# Altium PCB FlightEstimator.PcbDoc (part 1 of 2)
Units mm, origin at the board's own origin, x right, y up, seen from the top; angles counter-clockwise.
Board outline 49.66 x 49.66 mm, 6 copper layers (Top Layer, GND1, Middle, GND2, GND3, Bottom Layer), stack 1.959 mm thick; 78 components, 52 nets, 392 pads, 336 vias.
Unrouted connection lines stored in the file: 154.
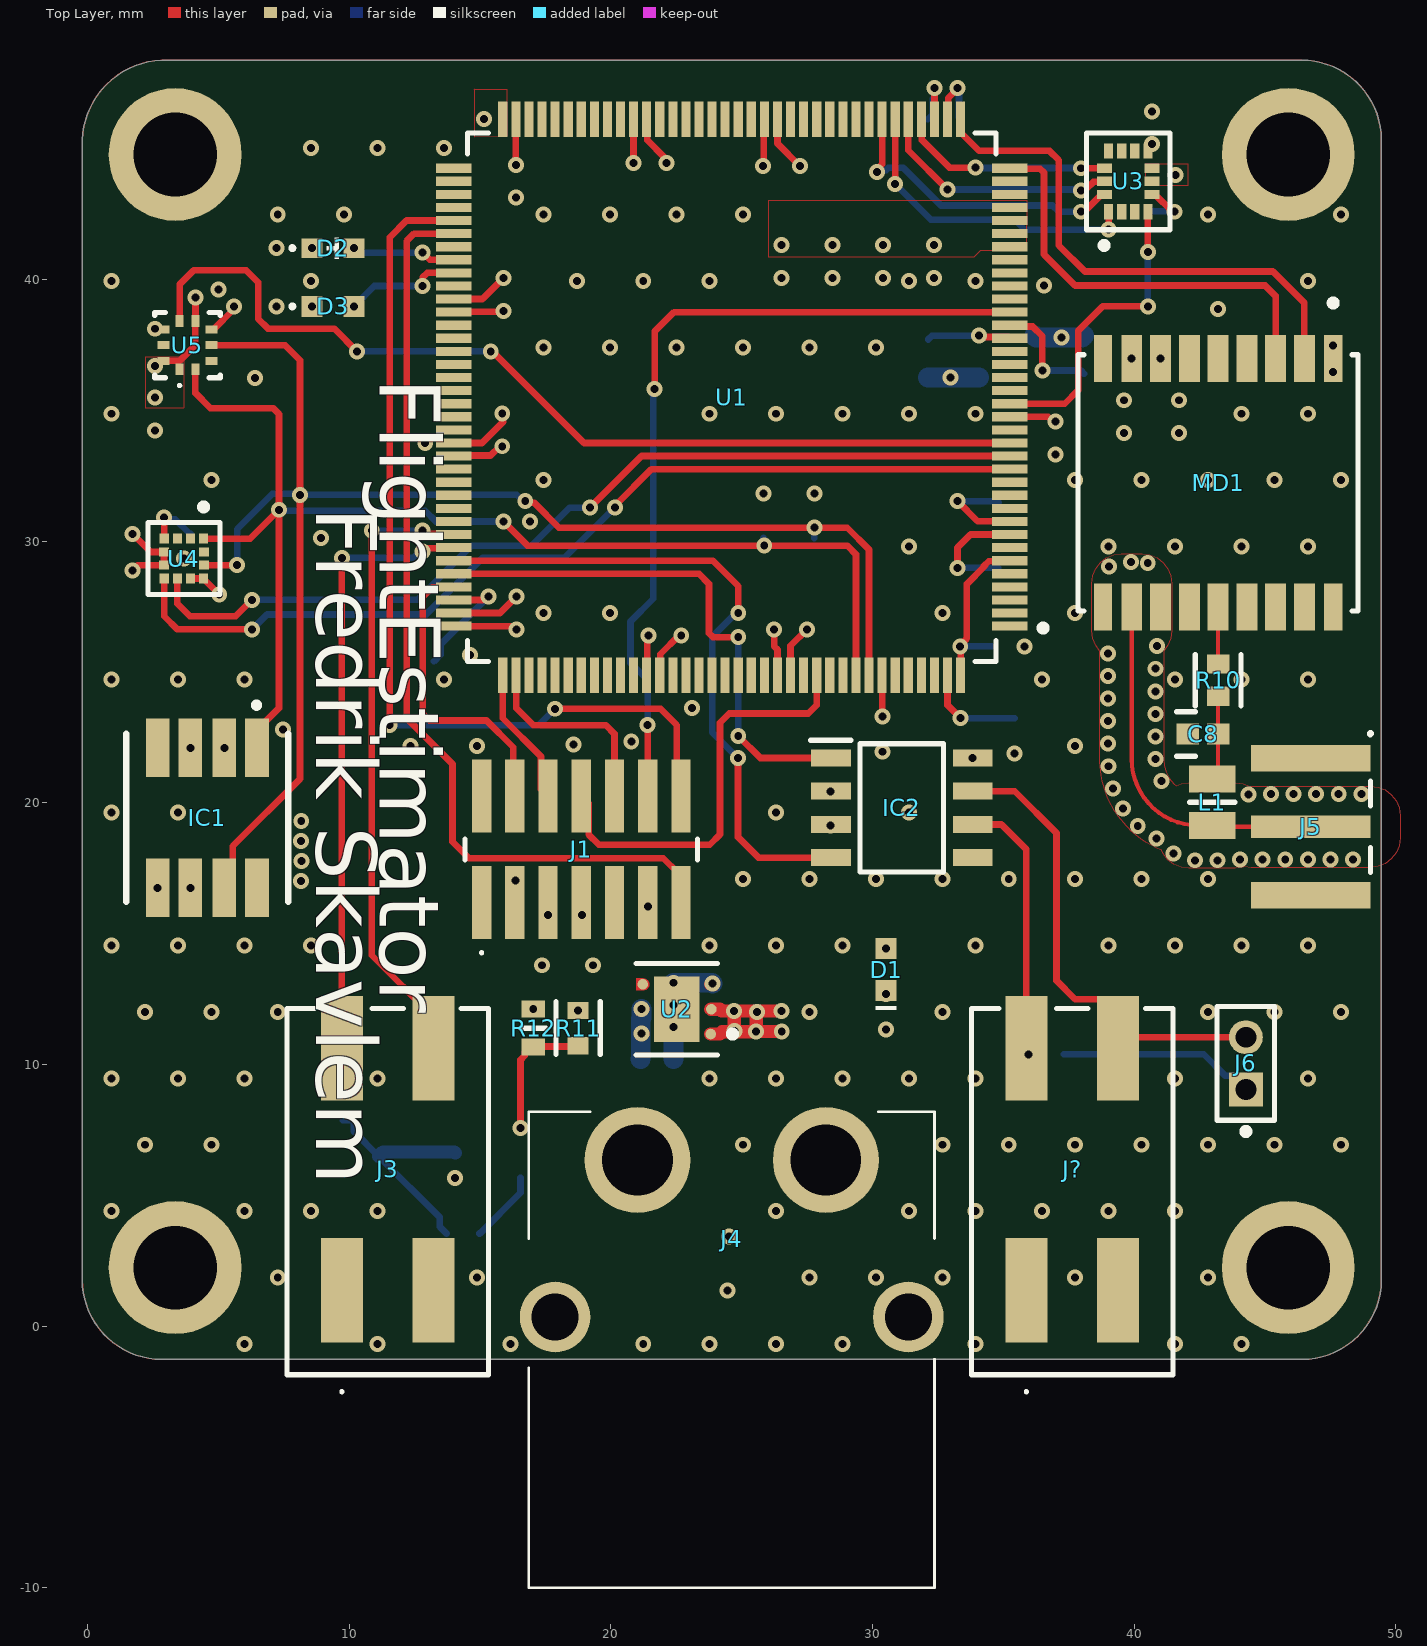
[diagram p0: Top Layer view]
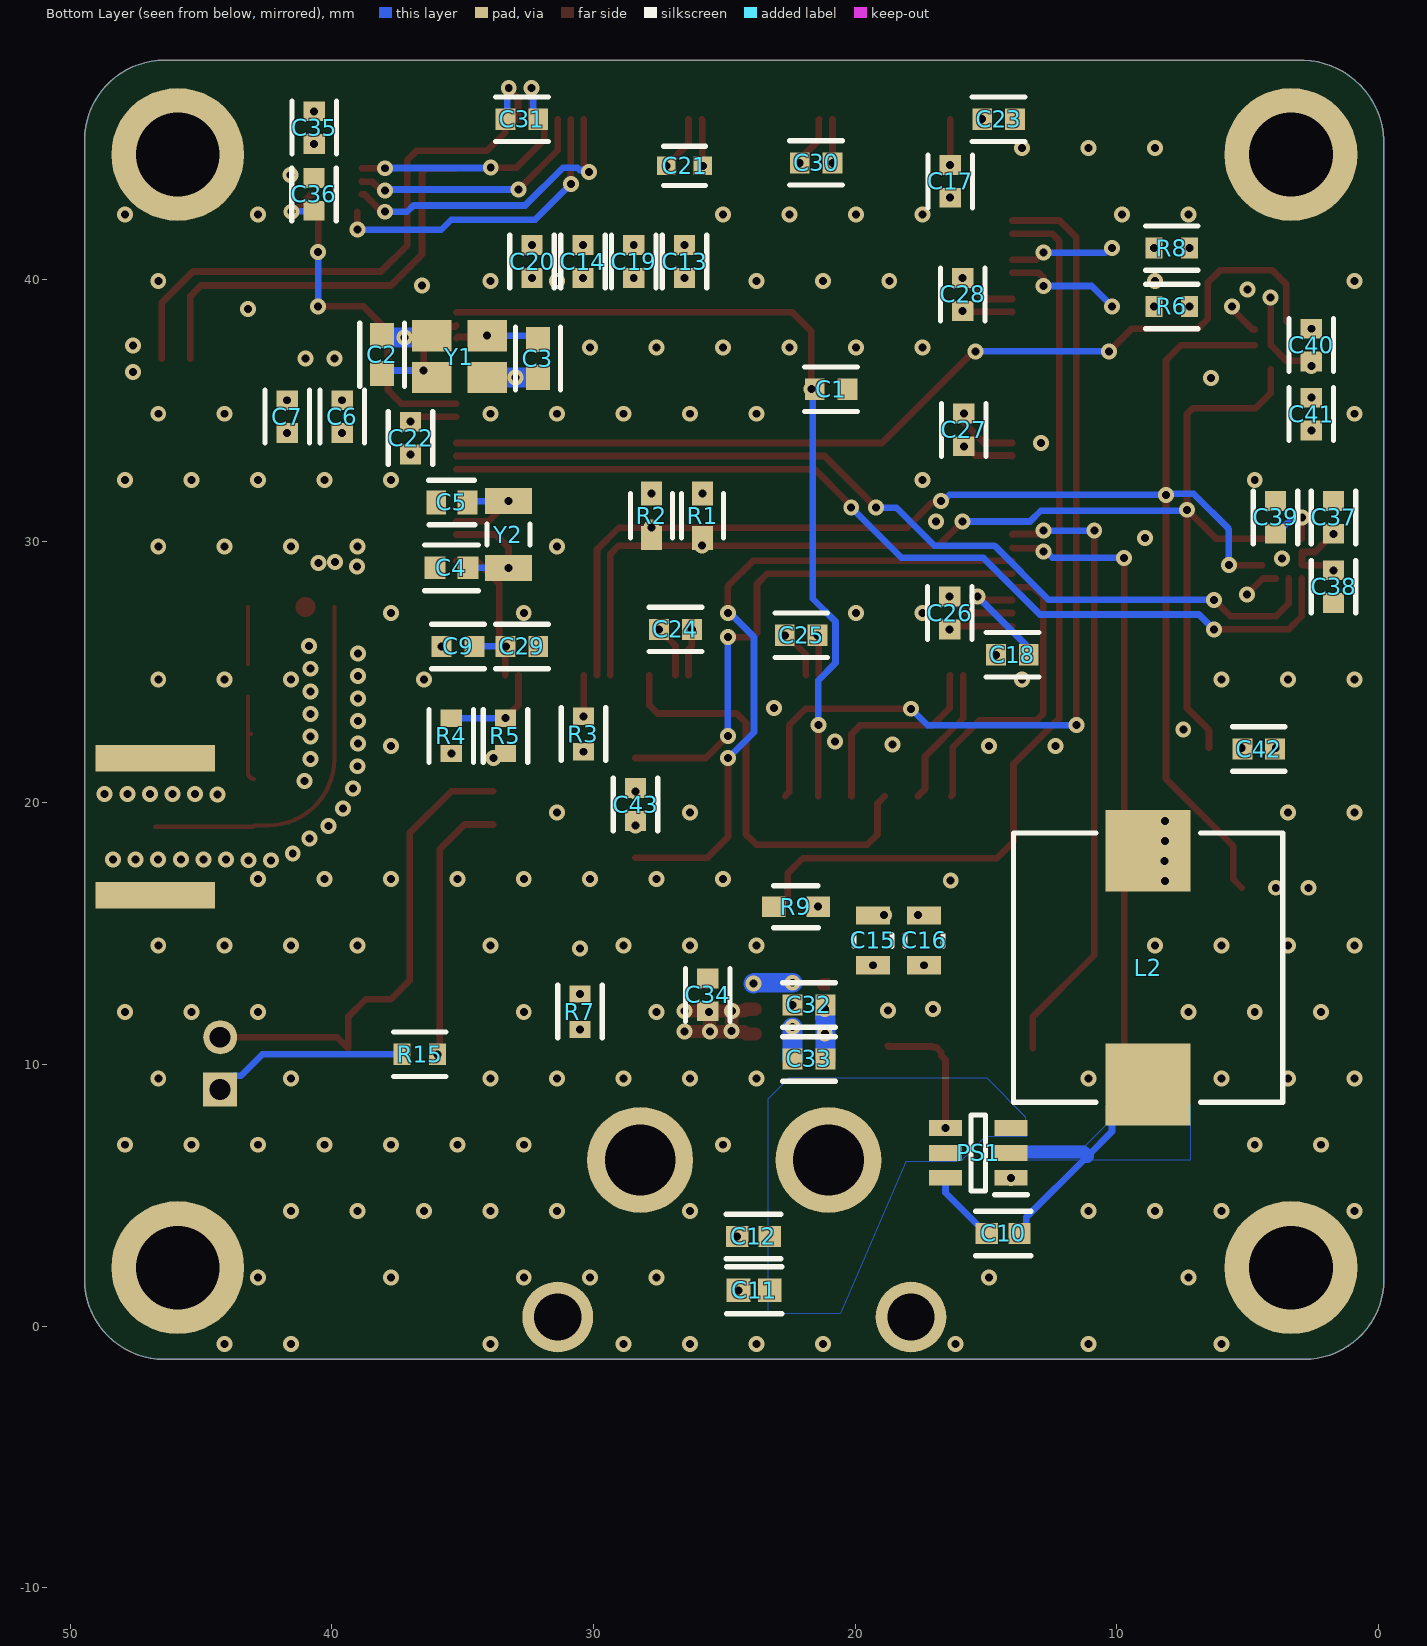
[diagram p1: Bottom Layer view, seen from below]
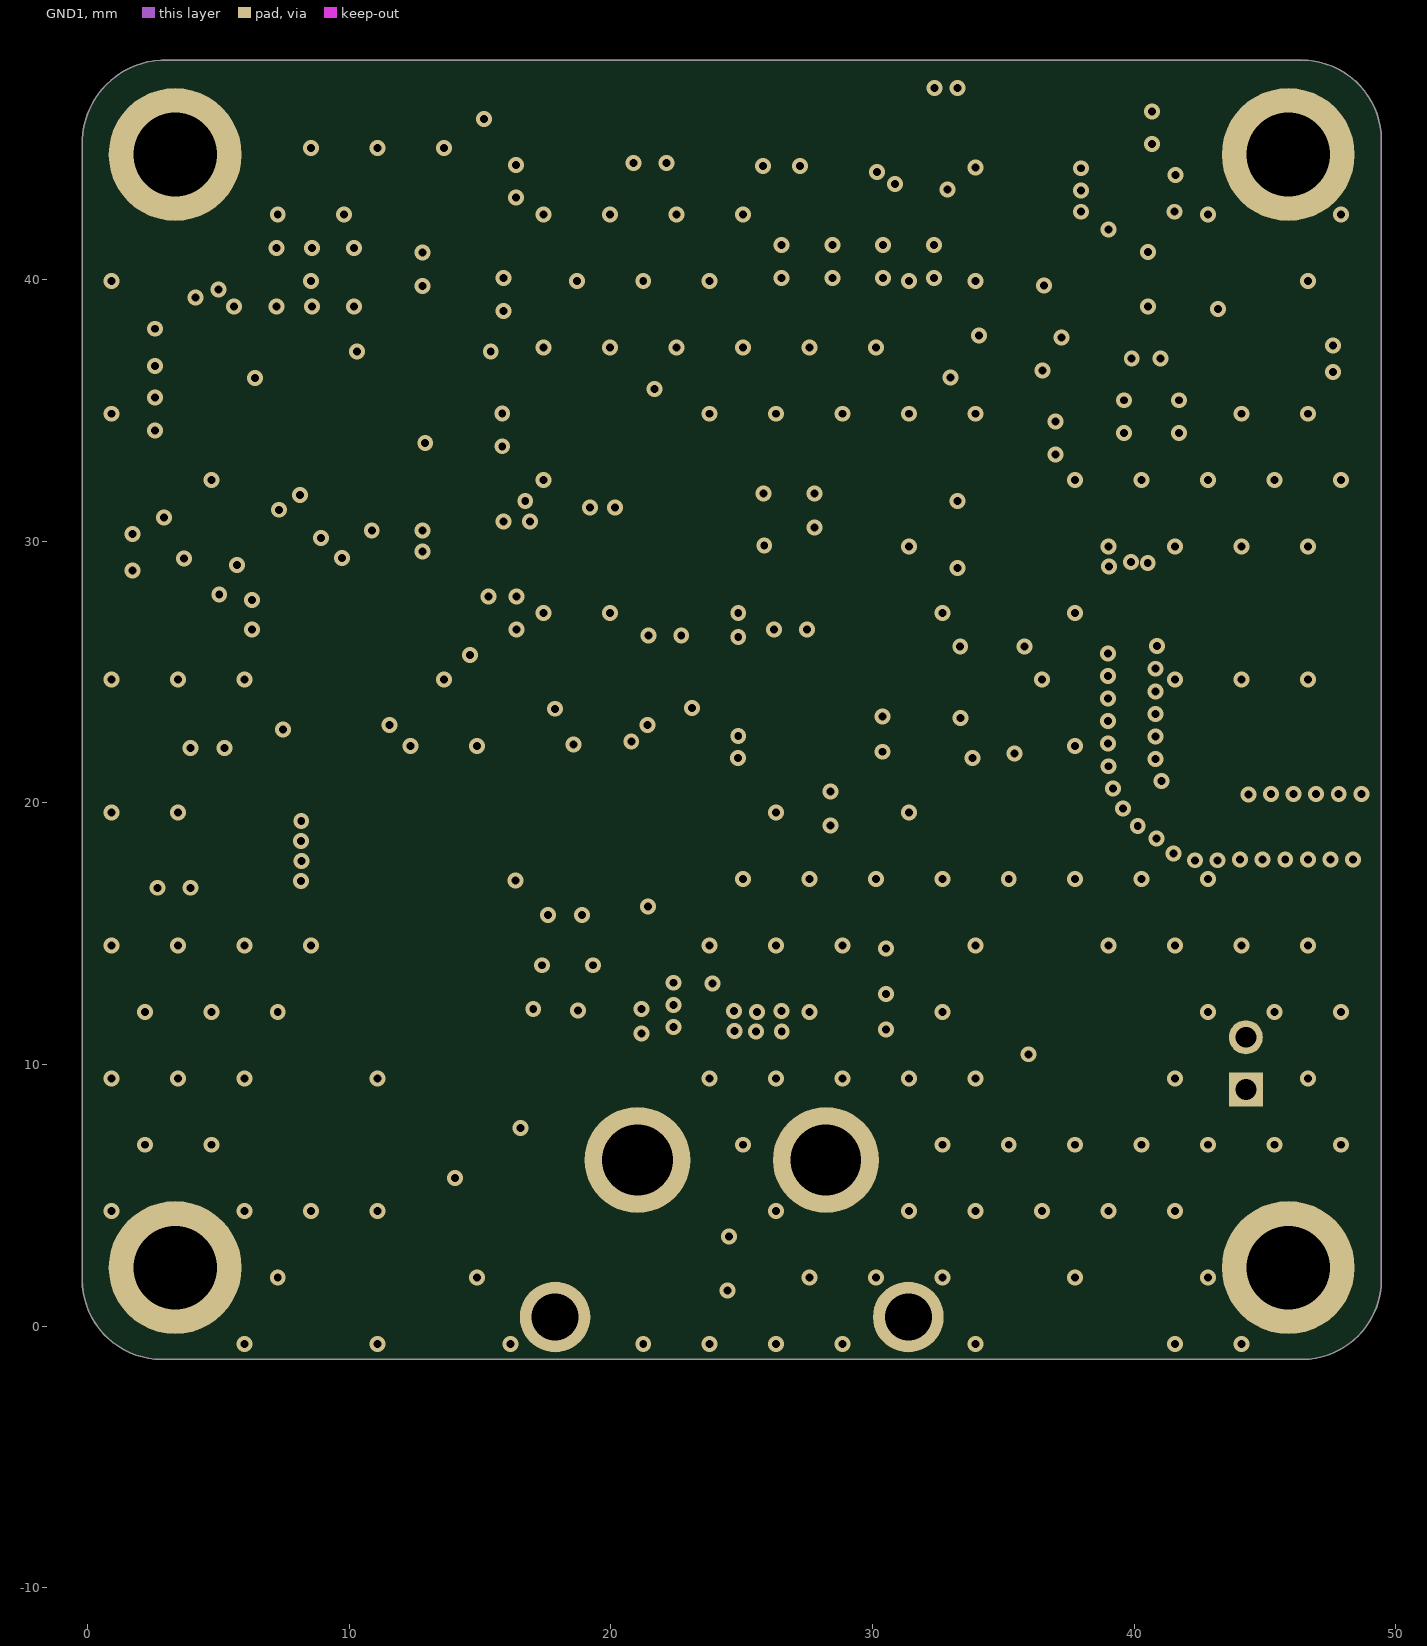
[diagram p2: GND1]
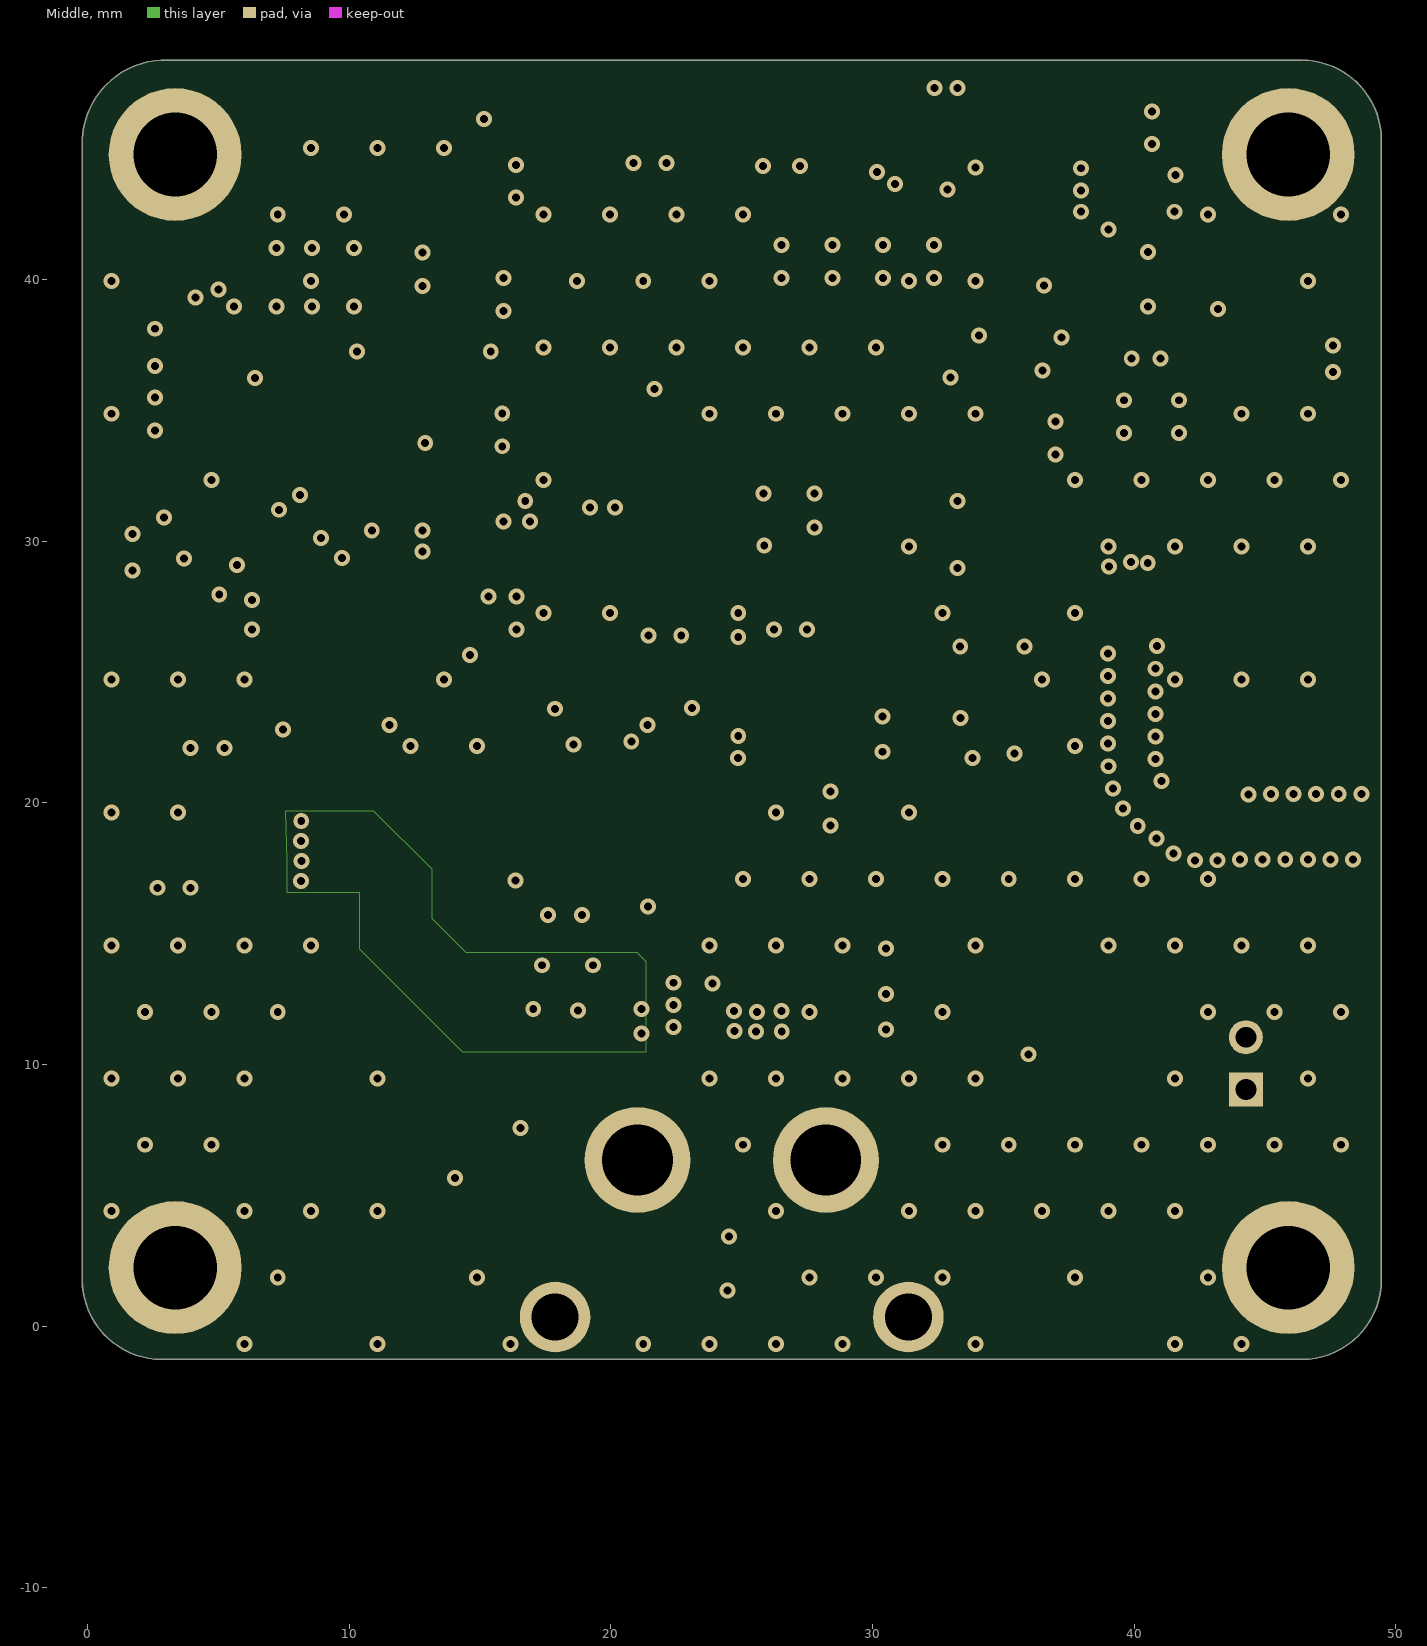
[diagram p3: Middle]
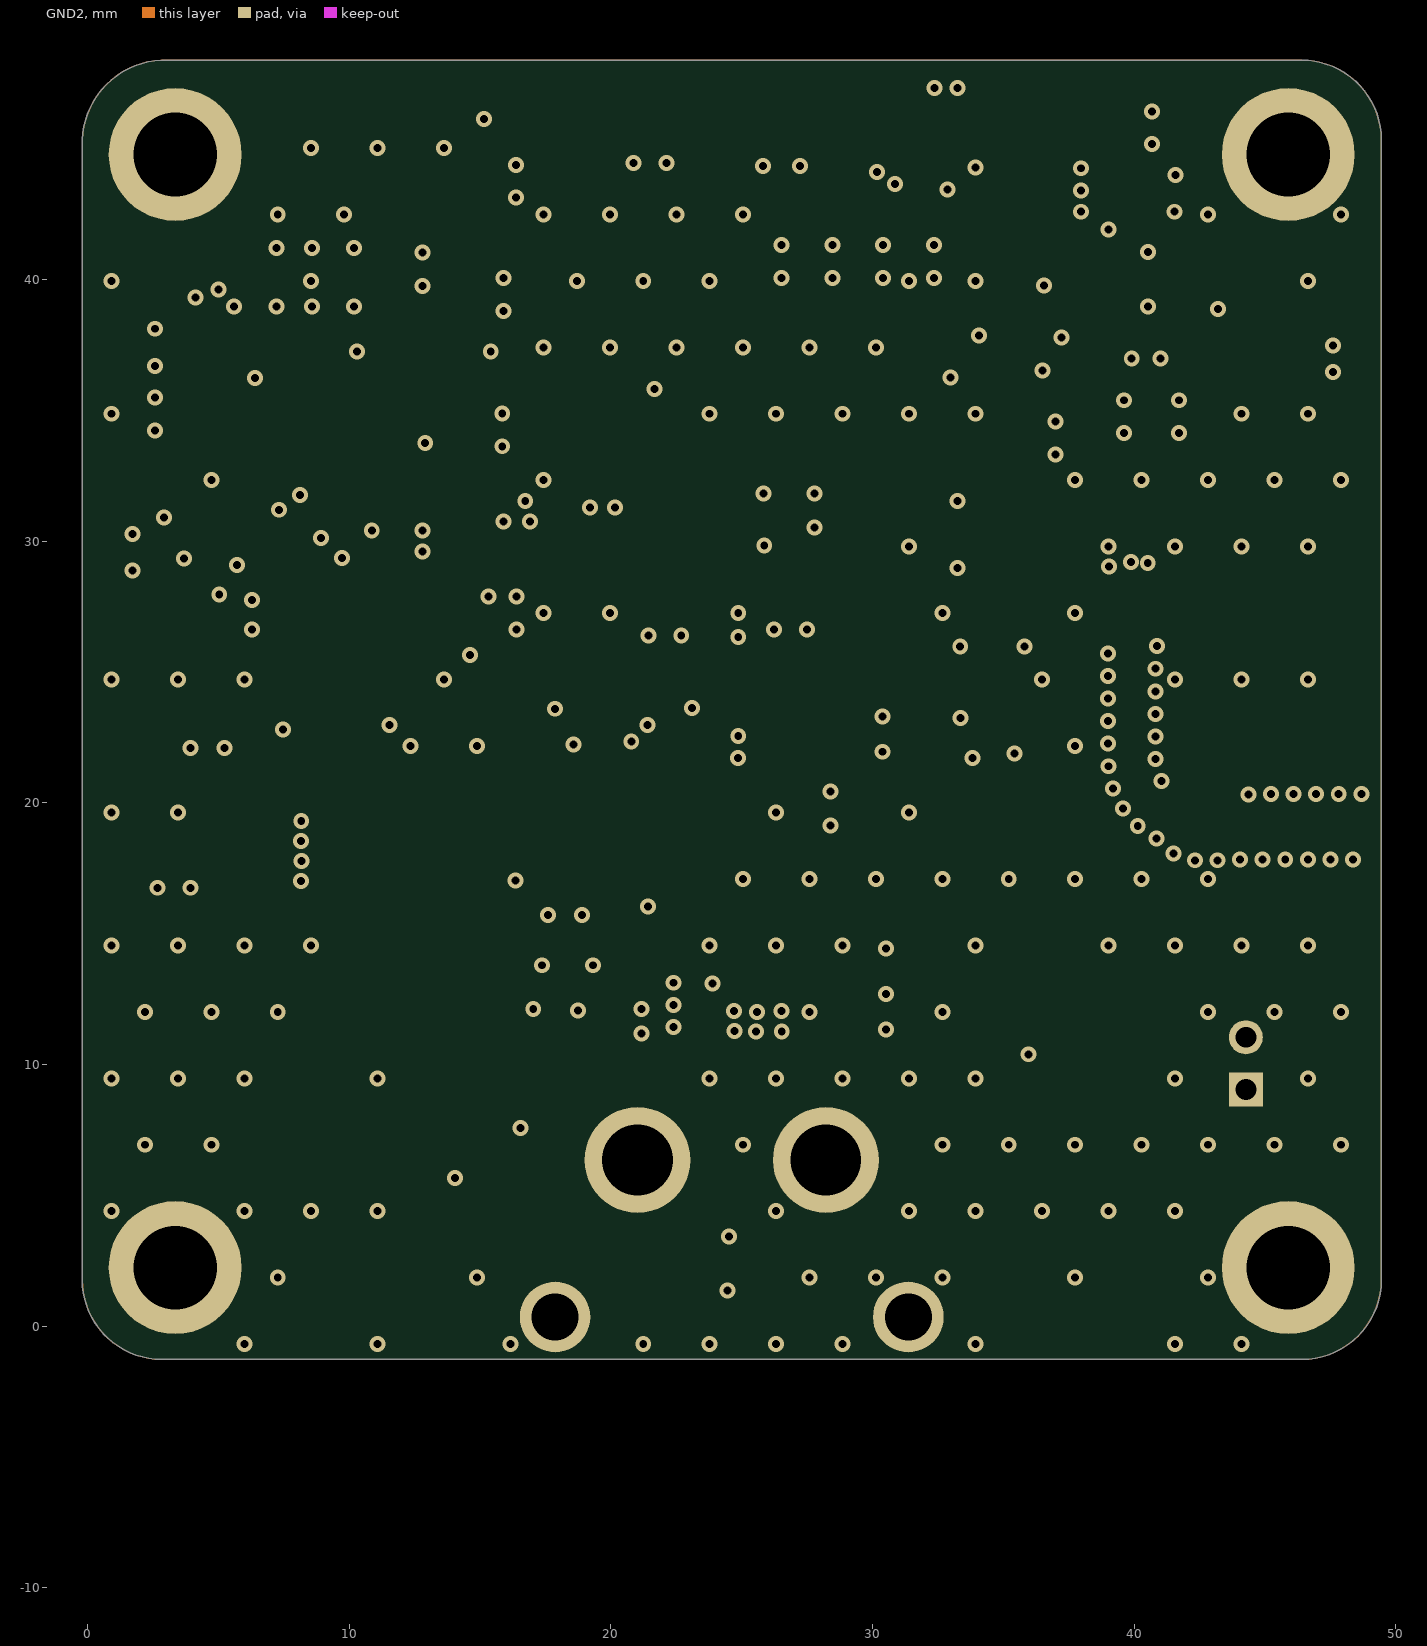
[diagram p4: GND2]
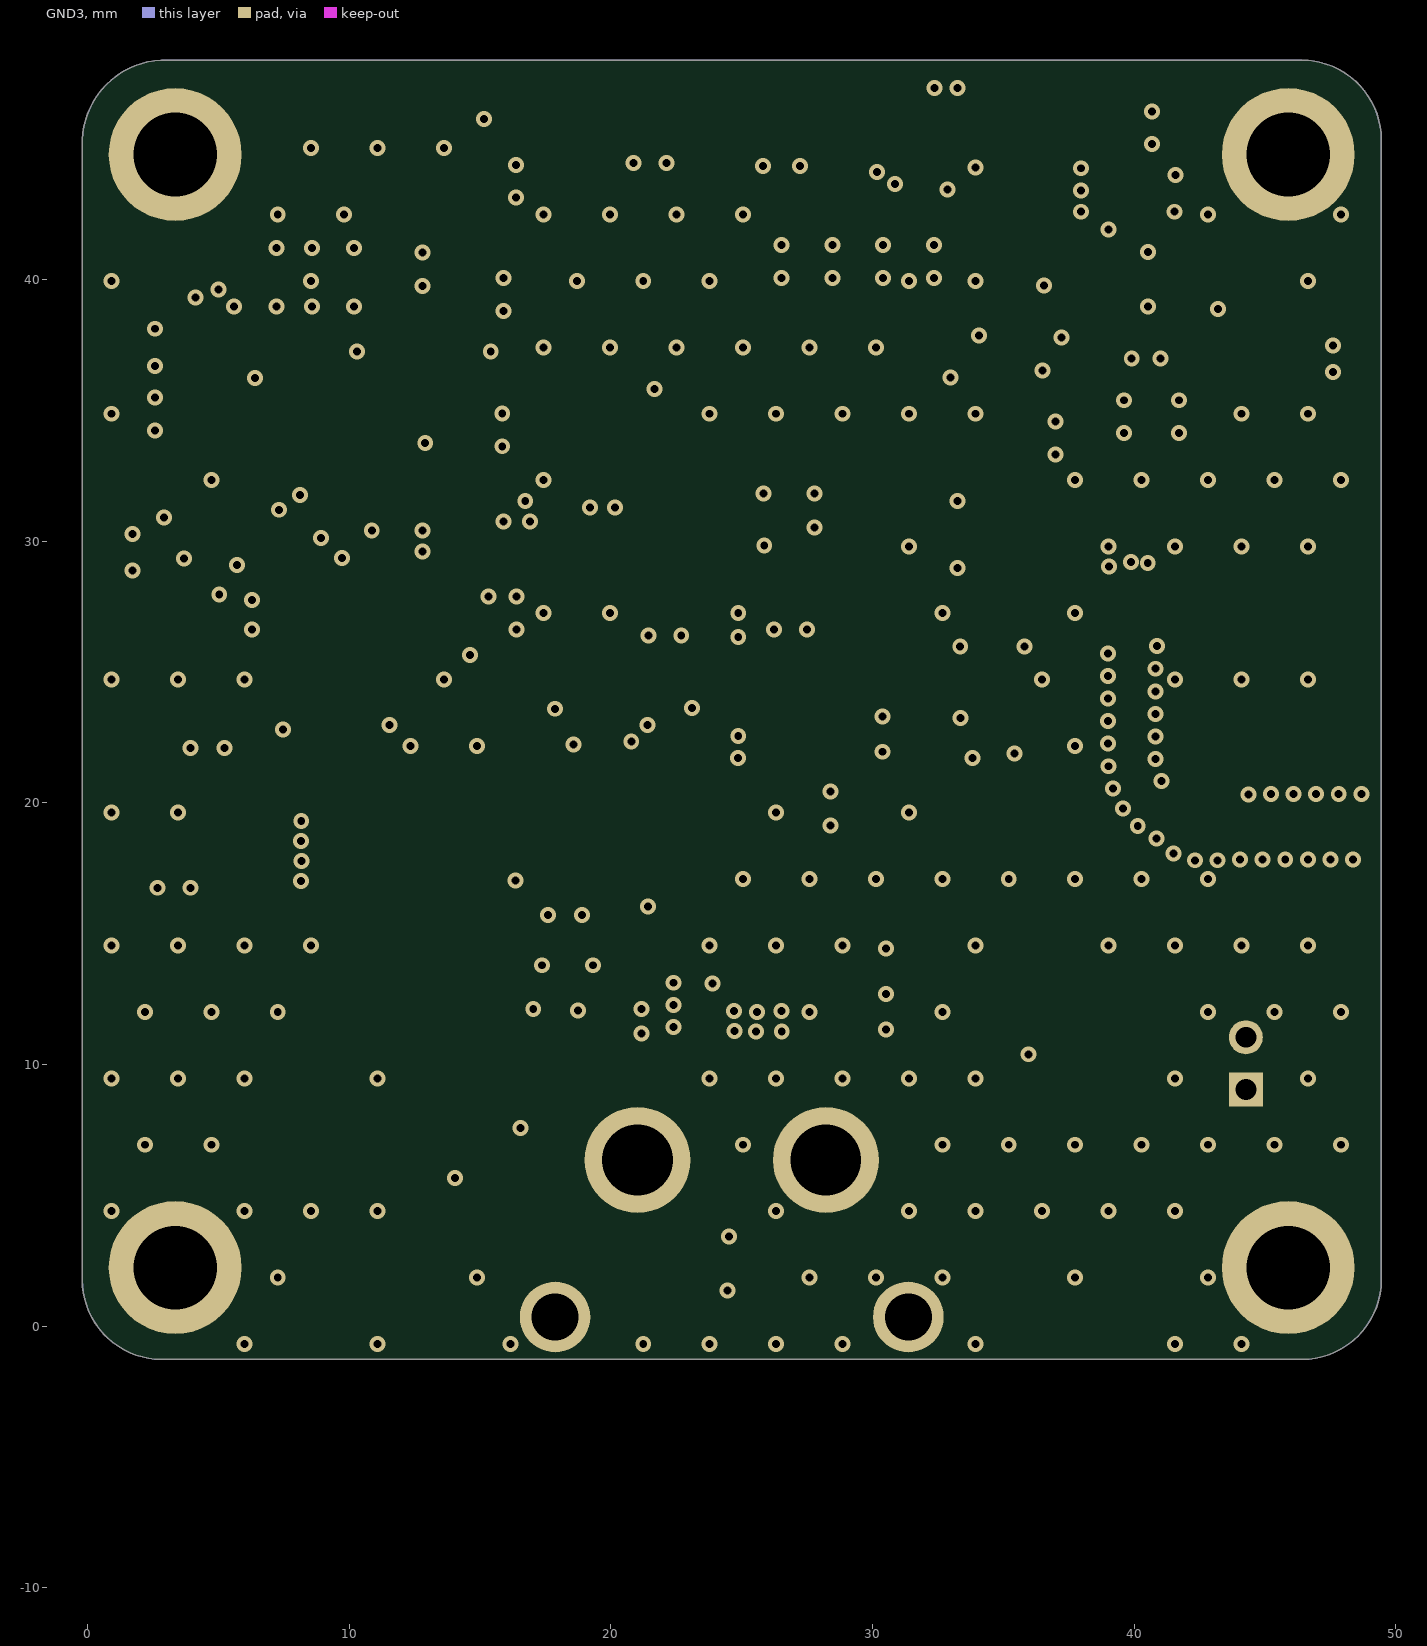
[diagram p5: GND3]
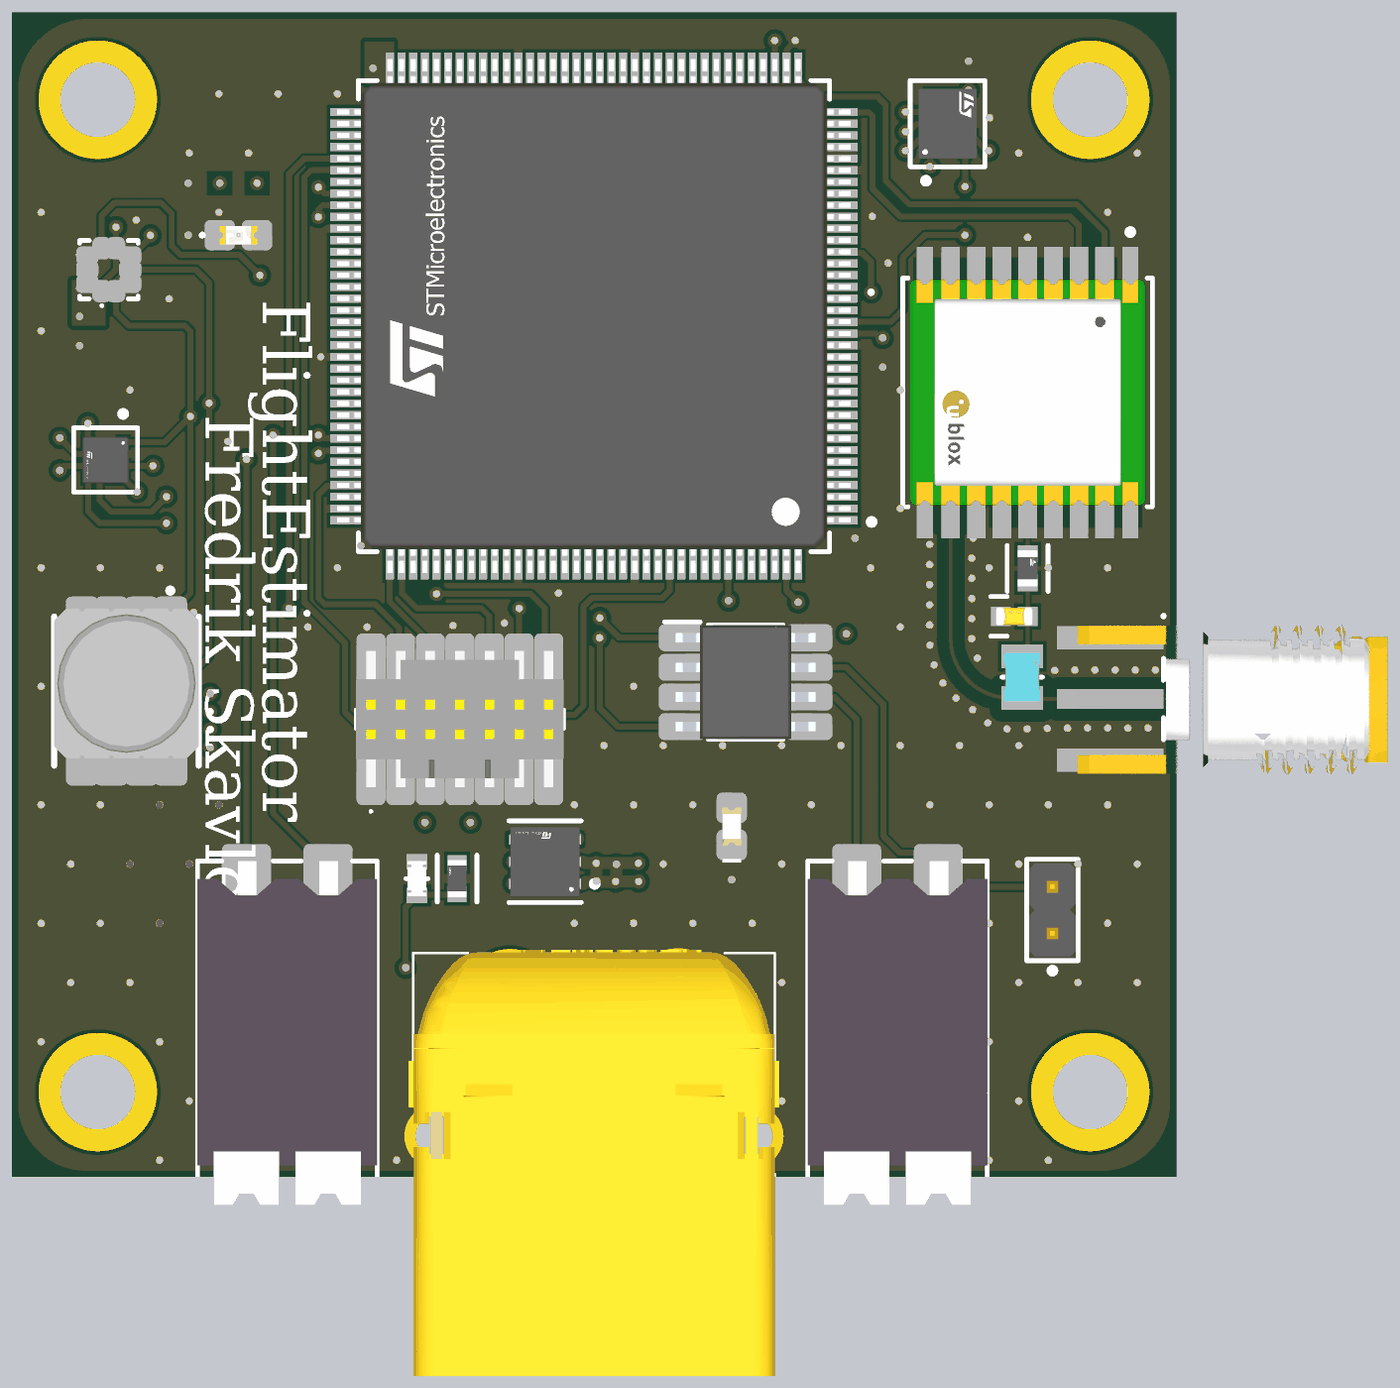
[diagram p7: 3D render of the assembled board from above, using the file's embedded part models]
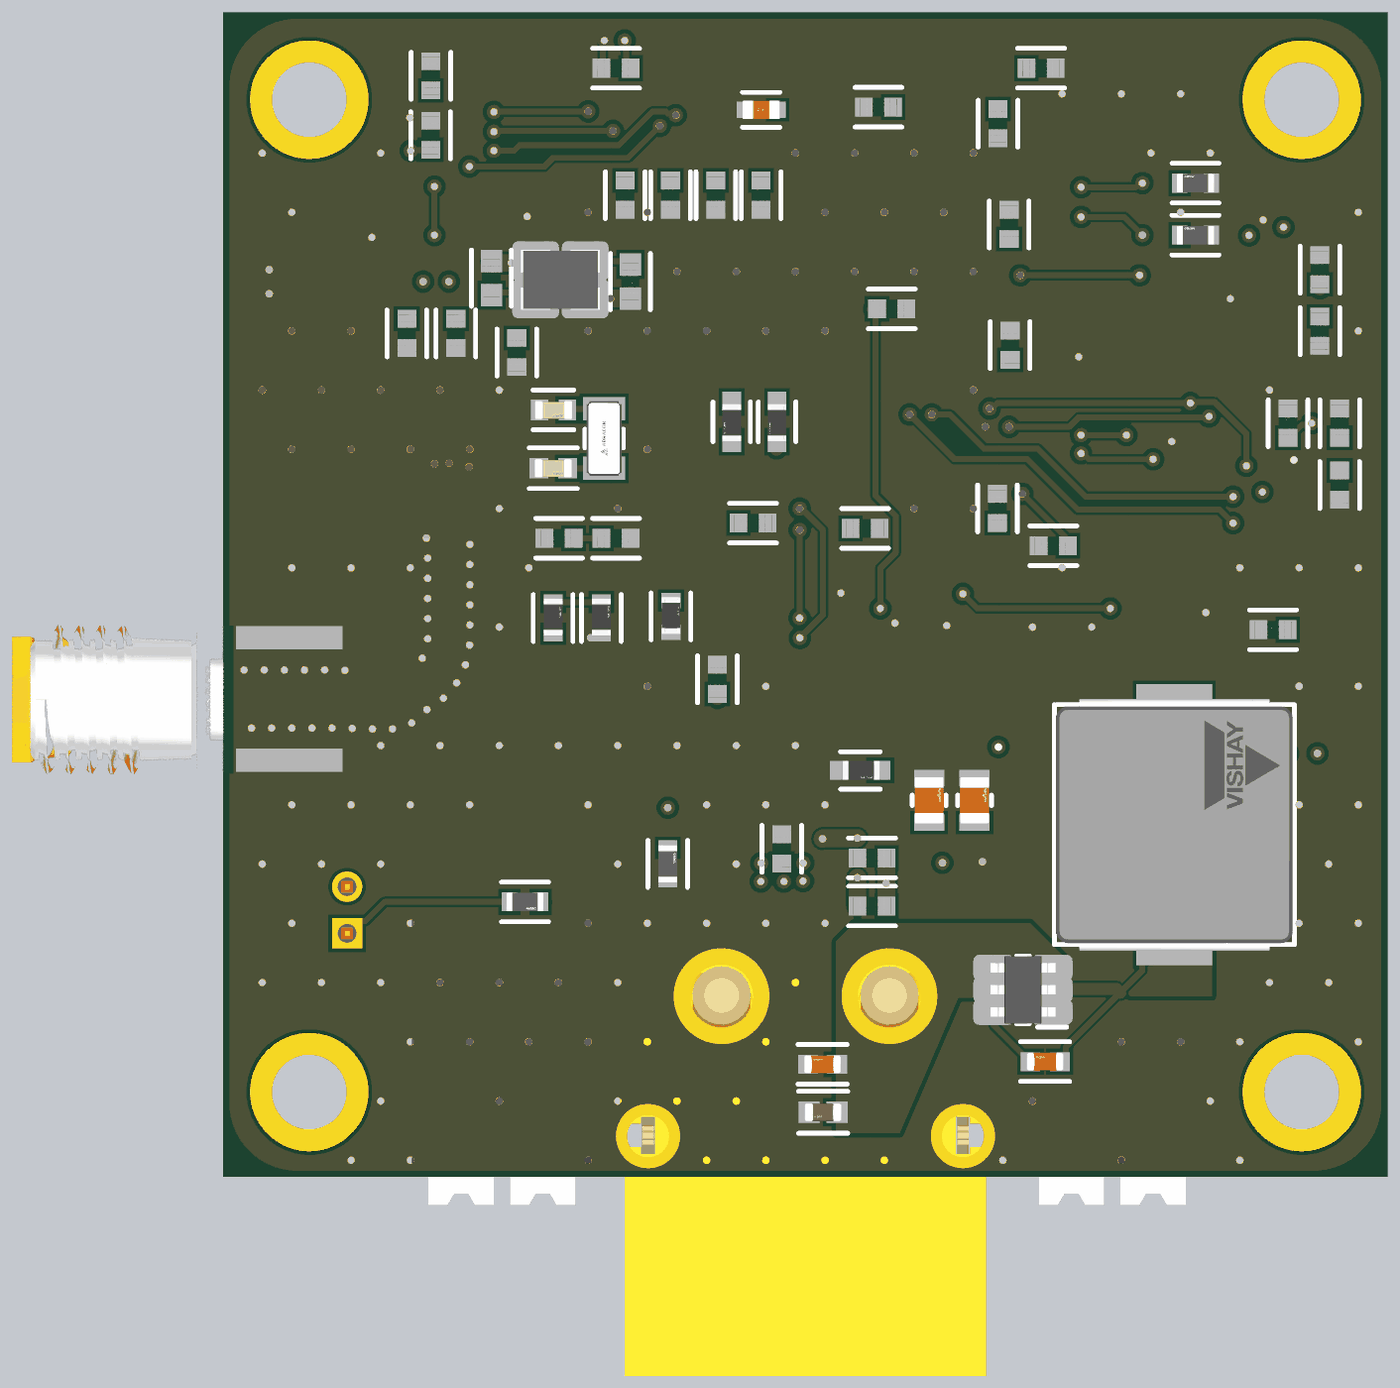
[diagram p8: 3D render of the assembled board from below, using the file's embedded part models]

## Layer stack, top to bottom
Top Solder: solder mask 0.0127, Solder Resist, Dk 3.3
Top Layer: signal copper 0.035
Dielectric 1: prepreg 0.0711, PP-006, Dk 4.1
GND1: signal copper 0.035
Dielectric 3: core 0.0711, PP-006, Dk 4.1
Middle: signal copper 0.0178
Dielectric1: prepreg 1.4986, FR-4, Dk 4.3
GND2: signal copper 0.0178
Dielectric 4: core 0.0711, PP-006, Dk 4.1
GND3: signal copper 0.035
Dielectric 2: prepreg 0.0711, PP-006, Dk 4.1
Bottom Layer: signal copper 0.035
Bottom Solder: solder mask 0.0127, Solder Resist, Dk 3.3

## Board outline
-0.209,1.778 ccw(c2.839,1.778) 2.839,-1.27 46.4,-1.27 ccw(c46.4,1.778) 49.448,1.778 49.448,45.339 ccw(c46.4,45.339) 46.4,48.387 3.093,48.387 ccw(c2.966,45.212) -0.209,45.339

## Design rules (kind name [scope] priority, off if disabled: settings)
BoardOutlineClearance [All] p1: gap=0.127 ignorepadtopadclearanceinfootprint=FALSE
Clearance "Stitching GND" [IsStitchingVia and InNet('GND') vs (IsVia and (Not IsStitchingVia)) Or IsPad] p1: gap=0.127 ignorepadtopadclearanceinfootprint=FALSE
Clearance [All] p2: gap=0.178 ignorepadtopadclearanceinfootprint=TRUE except(0.089: Arc-Arc Arc-Track Track-Track; 0.1: Arc-SMDPad Arc-THPad Arc-Fill Arc-Poly Arc-Region Track-SMDPad Track-THPad Track-Fill Track-Poly Track-Region; 0.15: SMDPad-SMDPad SMDPad-THPad SMDPad-Fill SMDPad-Poly SMDPad-Region THPad-THPad THPad-Fill THPad-Poly THPad-Region; 0.2: Arc-Hole Track-Hole SMDPad-Hole THPad-Hole Via-Hole Fill-Hole Poly-Hole Region-Hole)
ComponentClearance ComponentClearance_1 [InComponent('L1','L2','L3','C24','C25','C26','C27') vs InComponent('L1','L2','L3','C24','C25','C26','C27')] p1 off: gap=0 collisioncheckmode=3 verticalgap=0 showdistances=FALSE
ComponentClearance [All] p2: gap=0 collisioncheckmode=3 verticalgap=0 showdistances=FALSE
DiffPairsRouting [All] p1: maxlimit=0.254 minlimit=0.254 mostfreqgap=0.254 toplayer_minwidth=0.254 toplayer_maxwidth=0.254 toplayer_prefwidth=0.254 midlayer1_minwidth=0.254 midlayer1_maxwidth=0.254 midlayer1_prefwidth=0.254 midlayer2_minwidth=0.254 midlayer2_maxwidth=0.254 midlayer2_prefwidth=0.254 midlayer3_minwidth=0.254 midlayer3_maxwidth=0.254 midlayer3_prefwidth=0.254 midlayer4_minwidth=0.254 midlayer4_maxwidth=0.254 midlayer4_prefwidth=0.254 bottomlayer_minwidth=0.254 bottomlayer_maxwidth=0.254 bottomlayer_prefwidth=0.254 maxuncoupledlength=12.7
HoleSize [All] p1: absolutevalues=TRUE maxlimit=7.62 minlimit=0.2 maxpercent=80.000 minpercent=20.000
MinimumAnnularRing [All] p1: minimumring=0.1
MinimumSolderMaskSliver [All] p1: minsoldermaskwidth=0.1
PasteMaskExpansion PasteMaskExpansion_1 [InPadClass('All Pads')] p1: expansion=0
PasteMaskExpansion [All] p2: expansion=0.254
PlaneClearance [All] p1: clearance=0.381
PlaneConnect [All] p1: pad.planeconnectstyle=Relief pad.reliefexpansion=0.508 pad.reliefentries=4 pad.reliefconductorwidth=0.254 pad.reliefairgap=0.254 via.planeconnectstyle=Direct via.reliefexpansion=0.508 via.reliefentries=4 via.reliefconductorwidth=0.254 via.reliefairgap=0.254
PolygonConnect [All] p1: connectstyle=Direct reliefconductorwidth=0.254 reliefentries=4 polygonreliefangle="90 Angle" airgapwidth=0.254
RoutingLayers [All] p1: top layer_v5=TRUE mid layer 1_v5=TRUE mid layer 2_v5=TRUE mid layer 3_v5=FALSE mid layer 4_v5=FALSE bottom layer_v5=TRUE
RoutingVias [All] p1: holewidth=0.305 width=0.61 viastyle="Through Hole" minholewidth=0.305 minwidth=0.61 maxholewidth=25.4 maxwidth=25.4
SMDNeckDown [All] p1 off: percent=100.000
SilkToSilkClearance [All] p1 off: silktosilkclearance=0.254
SilkToSolderMaskClearance SilkscreenOverComponentPads [IsPad] p1: minsilkscreentomaskgap=0.15 clearancetoexposedcopper=TRUE
SolderMaskExpansion [InPadClass('All Pads')] p1: expansion=0 istentingtop=FALSE useseparateexpansions=TRUE expansionbottom=0 istentingbottom=FALSE
SolderMaskExpansion SolderMaskExpansion_1 [All] p2: expansion=0.025 istentingtop=TRUE useseparateexpansions=TRUE expansionbottom=0.025 istentingbottom=TRUE
SupplyNets "Schematic Supply Nets_3" [InNet('3V3')] p1: voltage=0.000
SupplyNets "Schematic Supply Nets_2" [InNet('GND')] p2: voltage=0.000
SupplyNets "Schematic Supply Nets_1" [InNet('DCREG5V0')] p3: voltage=0.000
SupplyNets "Schematic Supply Nets" [InNet('24V0')] p4: voltage=0.000
UnRoutedNet [All] p1: checkbadconnections=TRUE
Width [All] p1: maxlimit=7.62 minlimit=0.089 preferedwidth=0.254
19 further rules are at their usual default settings.

## Classes and differential pairs
component class TopLevel: J1 J3 J4 J? R9
component class PressureSensors: C40 C41 C42 IC1 U5
component class Power: C9 C10 C11 C12 C13 C14 C15 C16 C17 C18 C19 C20 C21 C22 C23 C24 C25 C26 C27 C28 C29 C30 C31 C32 C33 C34 L2 PS1 R11 R12 U2
component class MCU: C1 C2 C3 C4 C5 D1 D2 D3 R1 R2 R3 R4 R5 R6 R7 R8 U1 Y1 Y2
component class Magnometer: C37 C38 C39 U4
component class GNSS: C6 C7 C8 J5 L1 MD1 R10
component class CANTransceiver: C43 IC2 J6 R15
component class AccelerometerGyro: C35 C36 U3

## Components (designator, comment, footprint, x,y, rotation, side; value= is the part's Value field where it differs from the comment)
C1 "0.1uF" FP-CL10-IPC_C 20.917,35.814 r180 bottom
C2 "8pF" FP-CL10-IPC_B 38.08,37.133 r90 bottom
C3 "8pF" FP-CL10-IPC_B 32.121,36.985 r270 bottom
C4 "1.5pF" FP-C0603C-CF-IPC_C 35.429,28.983 r0 bottom value="1.5 pF"
C5 "1.5pF" FP-C0603C-CF-MFG 35.415,31.482 r0 bottom value="1.5 pF"
C6 "0.1uF" FP-CL10-IPC_C 39.605,34.763 r90 bottom
C7 "10uF" FP-CL10-IPC_C 41.705,34.763 r90 bottom
C8 "0.01uF" FP-CC0603-DA-IPC_C 42.63,22.631 r180 top locked value="10 nF"
C9 "0.1uF" FP-CL10-IPC_C 35.177,25.981 r0 bottom
C10 "0.1uf 0603" FP-GCJ188-0_2-IPC_C 14.341,3.543 r0 bottom
C11 "2.2uF 0603" FP-GRM188-0_2-IPC_C 23.86,1.372 r0 bottom
C12 "0.1uf 0603" FP-GCJ188-0_2-IPC_C 23.885,3.429 r0 bottom
C13 "1uF" FP-CL10-IPC_C 26.518,40.691 r270 bottom
C14 "0.1uF" FP-CL10-IPC_C 30.404,40.691 r270 bottom
C15 "22uf 0805" FP-GRM21B-0_2-e0_2_0_7-MFG 19.317,14.745 r90 bottom
C16 "22uf 0805" FP-GRM21B-0_2-e0_2_0_7-MFG 17.367,14.745 r90 bottom
C17 "2.2uF" FP-CL10-IPC_C 16.365,43.758 r270 bottom
C18 "2.2uF" FP-CL10-IPC_C 13.99,25.66 r0 bottom
C19 "1uF" FP-CL10-IPC_C 28.461,40.691 r270 bottom
C20 "0.1uF" FP-CL10-IPC_C 32.348,40.691 r270 bottom
C21 "4.7uF" FP-C1608-080-0_1-MFG 26.518,44.348 r180 bottom
C22 "0.1uF" FP-CL10-IPC_C 36.99,33.944 r270 bottom
C23 "0.1uF" FP-CL10-IPC_C 14.515,46.133 r180 bottom
C24 "0.1uF" FP-CL10-IPC_C 26.865,26.632 r180 bottom
C25 "0.1uF" FP-CL10-IPC_C 22.06,26.403 r180 bottom
C26 "0.1uF" FP-CL10-IPC_C 16.386,27.258 r90 bottom
C27 "0.1uF" FP-CL10-IPC_C 15.846,34.258 r90 bottom
C28 "0.1uF" FP-CL10-IPC_C 15.888,39.433 r90 bottom
C29 "0.1uF" FP-CL10-IPC_C 32.738,25.981 r180 bottom
C30 "0.1uF" FP-CL10-IPC_C 21.488,44.463 r0 bottom
C31 "0.1uF" FP-CL10-IPC_C 32.738,46.133 r0 bottom
C32 "10uF" FP-CL10-IPC_C 21.764,12.276 r0 bottom
C33 "0.1uF" FP-CL10-IPC_C 21.764,10.214 r0 bottom
C34 "10uF" FP-CL10-IPC_C 25.634,12.665 r90 bottom
C35 "0.1uF" FP-CL10-IPC_C 40.675,45.808 r90 bottom
C36 "10uF" FP-CL10-IPC_C 40.685,43.258 r90 bottom
C37 "10uF" FP-CL10-IPC_C 1.714,30.913 r90 bottom
C38 "0.1uF" FP-CL10-IPC_C 1.714,28.263 r270 bottom
C39 "0.1uF" FP-CL10-IPC_C 3.929,30.913 r270 bottom
C40 "0.1uF" FP-CL10-IPC_C 2.565,37.496 r270 bottom
C41 "10uF" FP-CL10-IPC_C 2.565,34.861 r90 bottom
C42 "0.1uF" FP-CL10-IPC_C 4.572,22.06 r0 bottom
C43 "1uF" FP-CL10-IPC_C 28.393,19.938 r90 bottom
D1 "150060RS75000" WL-SMCW_0603_150060xx75000 30.518,13.63 r90 top
D2 "150060GS55040" WL-SMCD_0603 1279.373,1311.205 r0 top
D3 "150060YS75020" WL-SMCW_0603_150060xx75020 9.373,38.976 r0 top
IC1 "MS580301BA01-00" MS580305BA 4.572,19.431 r90 top
IC2 "TCAN3414DR" SOIC127P600X175-8N 31.115,19.812 r0 top
J1 "FTSH-107-01-L-DV-K-TR" FTSH10701LDVKTR 18.865,18.223 r0 top locked
J3 "1412410000" 1412410000 11.465,5.146 r0 top locked
J4 "XT60PW-M" XT60PWM 24.615,6.35 r180 top locked
J5 "EMPCB.SMAFSTJ.B.HT" FP-EMPCB_SMAFSTJ_B_HT-MFG 53.779,19.088 r270 top locked
J6 "M22-2010205" FP-M22-2010205-MFG 44.267,10.042 r90 top
J? "1412410000" 1412410000 37.629,5.146 r0 top locked
L1 "LQW2BAS27NJ00L" FP-LQW2BAN_00-MFG 42.977,20.027 r90 top locked
L2 "6.8uH" FP-IHLP-4040DZ-FP_3_124x3-MFG 8.801,13.703 r90 bottom
MD1 "MAX-M10S-00B" FP-MAX-M10S-00B-MFG 43.205,32.233 r270 top locked
PS1 "LMR51430XDDCR" SOT95P280X110-6N 15.295,6.621 r0 bottom
R1 "4.7k" FP-RT0603-MFG 25.832,30.975 r270 bottom value=4.7KΩ
R2 "4.7k" FP-RT0603-MFG 27.775,30.975 r270 bottom value=4.7KΩ
R3 "10k" FP-RT0603-IPC_C 30.383,22.631 r90 bottom value=10KΩ
R4 "10k" FP-RT0603-IPC_C 35.433,22.562 r90 bottom value=10KΩ
R5 "10k" FP-RT0603-IPC_C 33.365,22.562 r90 bottom value=10KΩ
R6 "220 0603" FP-AF0603-IPC_C 7.898,38.976 r0 bottom
R7 "220 0603" FP-AF0603-IPC_C 30.518,12.02 r90 bottom
R8 "220 0603" FP-AF0603-IPC_C 7.896,41.205 r0 bottom
R9 "100" FP-RT0603-MFG 22.267,16.032 r180 bottom value=100Ω
R10 "10" FP-RCS0603-e3-IPC_C 43.205,24.689 r90 top locked
R11 "100k 0603" FP-RC0603-0_55-IPC_C 18.745,11.391 r90 top
R12 "13.7k" FP-ERJ3EK-MFG 17.031,11.391 r270 top
R15 "120" FP-AF0603-IPC_C 36.64,10.392 r180 bottom
U1 "STM32H753ZIT6" FP-LQFP144-1A-MFG 24.615,35.508 r180 top locked
U2 "LD39200PU33R" FP-DFN6-7946637-MFG 22.517,12.116 r180 top
U3 "LSM6DSO32TR" FP-LGA-14L-DM00249496-MFG 39.773,43.758 r90 top
U4 "LIS3MDL" FP-VFLGA-12-8365767-MFG 3.679,29.338 r270 top
U5 "LPS25HBTR" STM-LGA-10 3.815,37.496 r90 top locked
Y1 "FL0800008Q" FL0800008Q 35.121,37.058 r0 bottom
Y2 "ABS07AIG-32.768KHZ-6-D-T" FP-ABS07AIG-MFG 33.249,30.258 r90 bottom

## Footprints (in the part's own frame and the unit in brackets; to place one, negate y for a bottom-side part, rotate by r counter-clockwise, add the part's x,y. Pads: shape width x height; smd on the part's side, far side on the other; paste and mask are expansions set on the pad)
1412410000 [mm]
  rect 1.6x4 smd: 1(-1.75,-3.775) 2(-1.75,5.475) 3(1.75,-3.775) 4(1.75,5.475)
  silkscreen extent -3.85,-7.7 3.85,7, body extent -3.85,-7.76 3.85,6.99, height 9.65
FL0800008Q [mm]
  rect 1.5x1.2 smd: 1(-1.06,-0.8) 2(1.06,-0.8) 3(1.06,0.8) 4(-1.06,0.8)
  body extent -1.69,-1.28 1.69,1.28, height 0.88
FP-ABS07AIG-MFG [mm]
  rect 1x1.8 smd paste+0 mask+0: 1(-1.275,0) 2(1.275,0)
  silkscreen extent -0.4,-0.82 0.4,0.82, body extent -1.6,-0.75 1.6,0.75, height 0.9
FP-AF0603-IPC_C [mm]
  rect 0.659x0.812 smd paste+0 mask+0: 1(-0.677,0) 2(0.677,0)
  silkscreen extent -1.01,-0.85 1.01,0.85, body extent -0.8,-0.4 0.8,0.4, height 0.55
FP-C0603C-CF-IPC_C [mm]
  rect 0.807x0.858 smd paste+0 mask+0: 1(-0.626,0) 2(0.626,0)
  silkscreen extent -1.03,-0.87 1.03,0.87, body extent -0.8,-0.4 0.8,0.4, height 0.87
FP-C0603C-CF-MFG [mm]
  rect 0.75x0.9 smd paste+0 mask+0: 1(-0.6,0) 2(0.6,0)
  silkscreen extent -0.87,-0.85 0.88,0.85, body extent -0.8,-0.4 0.8,0.4, height 0.87
FP-C1608-080-0_1-MFG [mm]
  rect 0.7x0.7 smd paste+0 mask+0: 1(-0.7,0) 2(0.7,0)
  silkscreen extent -0.8,-0.75 0.8,0.75, body extent -0.8,-0.4 0.8,0.4, height 0.9
FP-CC0603-DA-IPC_C [mm]
  rect 0.858x0.812 smd paste+0 mask+0: 1(-0.577,0) 2(0.577,0)
  silkscreen extent 0.3,-0.85 1.01,0.85, body extent -1.11,-0.55 1.11,0.55, height 0.25
FP-CL10-IPC_B [mm]
  rect 0.958x0.912 smd paste+0 mask+0: 1(-0.727,0) 2(0.727,0)
  silkscreen extent -1.21,-0.86 1.21,0.86, body extent -0.8,-0.4 0.8,0.4, height 0.9
FP-CL10-IPC_C [mm]
  rect 0.758x0.812 smd paste+0 mask+0: 1(-0.627,0) 2(0.627,0)
  silkscreen extent -1.01,-0.85 1.01,0.85, body extent -0.8,-0.4 0.8,0.4, height 0.9
FP-DFN6-7946637-MFG [mm]
  round 0.405 smd paste+0 mask+0: 1(-1.3,0.95) 2(-1.321,0) 3(-1.321,-0.95) 4(1.3,-0.95) 5(1.321,0) 6(1.321,0.95)
  rect 1.75x2.5 smd paste+0 mask+0: 7(0,0)
  Top Layer region: 1.55,0.725 1.275,0.725 1.189,0.742 1.116,0.791 1.067,0.864 1.05,0.95 1.05,0.95 1.067,1.036 1.116,1.109 1.189,1.158 1.275,1.175 1.275,1.175 1.55,1.175
  Top Layer region: 1.55,-0.225 1.275,-0.225 1.189,-0.208 1.116,-0.159 1.067,-0.086 1.05,0 1.05,0 1.067,0.086 1.116,0.159 1.189,0.208 1.275,0.225 1.275,0.225 1.55,0.225
  Top Layer region: 1.55,-1.175 1.275,-1.175 1.189,-1.158 1.116,-1.109 1.067,-1.036 1.05,-0.95 1.05,-0.95 1.067,-0.864 1.116,-0.791 1.189,-0.742 1.275,-0.725 1.275,-0.725 1.55,-0.725
  Top Layer region: -1.55,-0.725 -1.275,-0.725 -1.189,-0.742 -1.116,-0.791 -1.067,-0.864 -1.05,-0.95 -1.05,-0.95 -1.067,-1.036 -1.116,-1.109 -1.189,-1.158 -1.275,-1.175 -1.275,-1.175 -1.55,-1.175
  Top Layer region: -1.55,0.225 -1.275,0.225 -1.189,0.208 -1.116,0.159 -1.067,0.086 -1.05,0 -1.05,0 -1.067,-0.086 -1.116,-0.159 -1.189,-0.208 -1.275,-0.225 -1.275,-0.225 -1.55,-0.225
  Top Layer region: -1.55,1.175 -1.275,1.175 -1.189,1.158 -1.116,1.109 -1.067,1.036 -1.05,0.95 -1.05,0.95 -1.067,0.864 -1.116,0.791 -1.189,0.742 -1.275,0.725 -1.275,0.725 -1.55,0.725
  silkscreen extent -2.25,-1.75 1.55,1.75, body extent -1.65,-1.65 1.65,1.65, height 0.25
FP-EMPCB_SMAFSTJ_B_HT-MFG [mm]
  rect 0.85x4.56 smd paste+0 mask+0: 1(0,-7.03)
  rect 1x4.56 smd paste+0 mask+0: 2(-2.62,-7.03) 3(2.62,-7.03)
  rect 1x4.56 smd far side paste+0 mask+0: 4(-2.62,-7.03) 5(2.62,-7.03)
  silkscreen extent -3.57,-4.75 1.75,-4.75, body extent -3.17,-8.45 3.22,4.85, height 3.84
FP-ERJ3EK-MFG [mm]
  rect 0.65x0.9 smd paste+0 mask+0: 1(-0.725,0) 2(0.725,0)
  silkscreen extent 0,-0.48 0,0.48, body extent -1.15,-0.58 1.15,0.58, height 0.25
FP-GCJ188-0_2-IPC_C [mm]
  rect 0.855x0.812 smd paste+0 mask+0: 1(-0.625,0) 2(0.625,0)
  silkscreen extent -1.05,-0.85 1.05,0.85, body extent -0.8,-0.4 0.8,0.4, height 0.9
FP-GRM21B-0_2-e0_2_0_7-MFG [mm]
  rect 0.7x1.3 smd paste+0 mask+0: 1(-0.95,0) 2(0.95,0)
  silkscreen extent -0.23,-0.72 0.23,0.72, body extent -1,-0.63 1,0.63, height 1.45
FP-GRM188-0_2-IPC_C [mm]
  rect 0.905x0.906 smd paste+0 mask+0: 1(-0.601,0) 2(0.601,0)
  silkscreen extent -1.05,-0.9 1.05,0.9, body extent -0.8,-0.4 0.8,0.4, height 1
FP-IHLP-4040DZ-FP_3_124x3-MFG [mm]
  rect 3.124x3.251 smd paste+0 mask+0: 1(-4.47,0) 2(4.47,0)
  silkscreen extent -5.14,-5.14 5.14,5.14, body extent -5.4,-5.08 5.4,5.08, height 4
FP-LGA-14L-DM00249496-MFG [mm]
  rect 0.575x0.35 smd paste-1000 mask+0: 1(-1.162,0.75) 2(-1.162,0.25) 3(-1.162,-0.25) 4(-1.162,-0.75) 8(1.162,-0.75) 9(1.162,-0.25) 10(1.162,0.25) 11(1.162,0.75)
  rect 0.35x0.575 smd paste-1000 mask+0: 5(-0.5,-0.913) 6(0,-0.913) 7(0.5,-0.913) 12(0.5,0.913) 13(0,0.913) 14(-0.5,0.913)
  silkscreen extent -2.57,-1.6 1.85,1.6, body extent -2.05,-1.8 2.05,1.8, height 0.25
FP-LQFP144-1A-MFG [mm]
  rect 1.35x0.35 smd paste+0 mask+0: 1(-10.625,8.75) 2(-10.625,8.25) 3(-10.625,7.75) 4(-10.625,7.25) 5(-10.625,6.75) 6(-10.625,6.25) 7(-10.625,5.75) 8(-10.625,5.25) 9(-10.625,4.75) 10(-10.625,4.25) 11(-10.625,3.75) 12(-10.625,3.25) 13(-10.625,2.75) 14(-10.625,2.25) 15(-10.625,1.75) 16(-10.625,1.25) 17(-10.625,0.75) 18(-10.625,0.25) 19(-10.625,-0.25) 20(-10.625,-0.75) 21(-10.625,-1.25) 22(-10.625,-1.75) 23(-10.625,-2.25) 24(-10.625,-2.75) 25(-10.625,-3.25) 26(-10.625,-3.75) 27(-10.625,-4.25) 28(-10.625,-4.75) 29(-10.625,-5.25) 30(-10.625,-5.75) 31(-10.625,-6.25) 32(-10.625,-6.75) 33(-10.625,-7.25) 34(-10.625,-7.75) 35(-10.625,-8.25) 36(-10.625,-8.75) 73(10.625,-8.75) 74(10.625,-8.25) 75(10.625,-7.75) 76(10.625,-7.25) 77(10.625,-6.75) 78(10.625,-6.25) 79(10.625,-5.75) 80(10.625,-5.25) 81(10.625,-4.75) 82(10.625,-4.25) 83(10.625,-3.75) 84(10.625,-3.25) 85(10.625,-2.75) 86(10.625,-2.25) 87(10.625,-1.75) 88(10.625,-1.25) 89(10.625,-0.75) 90(10.625,-0.25) 91(10.625,0.25) 92(10.625,0.75) 93(10.625,1.25) 94(10.625,1.75) 95(10.625,2.25) 96(10.625,2.75) 97(10.625,3.25) 98(10.625,3.75) 99(10.625,4.25) 100(10.625,4.75) 101(10.625,5.25) 102(10.625,5.75) 103(10.625,6.25) 104(10.625,6.75) 105(10.625,7.25) 106(10.625,7.75) 107(10.625,8.25) 108(10.625,8.75)
  rect 0.35x1.35 smd paste+0 mask+0: 37(-8.75,-10.625) 38(-8.25,-10.625) 39(-7.75,-10.625) 40(-7.25,-10.625) 41(-6.75,-10.625) 42(-6.25,-10.625) 43(-5.75,-10.625) 44(-5.25,-10.625) 45(-4.75,-10.625) 46(-4.25,-10.625) 47(-3.75,-10.625) 48(-3.25,-10.625) 49(-2.75,-10.625) 50(-2.25,-10.625) 51(-1.75,-10.625) 52(-1.25,-10.625) 53(-0.75,-10.625) 54(-0.25,-10.625) 55(0.25,-10.625) 56(0.75,-10.625) 57(1.25,-10.625) 58(1.75,-10.625) 59(2.25,-10.625) 60(2.75,-10.625) 61(3.25,-10.625) 62(3.75,-10.625) 63(4.25,-10.625) 64(4.75,-10.625) 65(5.25,-10.625) 66(5.75,-10.625) 67(6.25,-10.625) 68(6.75,-10.625) 69(7.25,-10.625) 70(7.75,-10.625) 71(8.25,-10.625) 72(8.75,-10.625) 109(8.75,10.625) 110(8.25,10.625) 111(7.75,10.625) 112(7.25,10.625) 113(6.75,10.625) 114(6.25,10.625) 115(5.75,10.625) 116(5.25,10.625) 117(4.75,10.625) 118(4.25,10.625) 119(3.75,10.625) 120(3.25,10.625) 121(2.75,10.625) 122(2.25,10.625) 123(1.75,10.625) 124(1.25,10.625) 125(0.75,10.625) 126(0.25,10.625) 127(-0.25,10.625) 128(-0.75,10.625) 129(-1.25,10.625) 130(-1.75,10.625) 131(-2.25,10.625) 132(-2.75,10.625) 133(-3.25,10.625) 134(-3.75,10.625) 135(-4.25,10.625) 136(-4.75,10.625) 137(-5.25,10.625) 138(-5.75,10.625) 139(-6.25,10.625) 140(-6.75,10.625) 141(-7.25,10.625) 142(-7.75,10.625) 143(-8.25,10.625) 144(-8.75,10.625)
  silkscreen extent -12.03,-10.1 10.1,10.1, body extent -11.4,-11.4 11.4,11.4, height 0.25
FP-LQW2BAN_00-MFG [mm]
  rect 1.02x1.78 smd paste+0 mask+0: 1(-0.89,0) 2(0.89,0)
  silkscreen extent 0,-0.86 0,0.86, body extent -1.5,-0.99 1.5,0.99, height 0.25
FP-M22-2010205-MFG [mm]
  rect 1.3x1.3 hole 0.8 paste-2539.97 mask+0: 1(-1,0)
  round 1.3 hole 0.8 paste-2539.97 mask+0: 2(1,0)
  silkscreen extent -2.72,-1.1 2.17,1.1, body extent -2.27,-1.2 2.27,1.2, height 0.25
FP-MAX-M10S-00B-MFG [mm]
  rect 1.8x0.7 smd paste-1000 mask+0: 1(-4.75,4.4) 9(-4.75,-4.4) 10(4.75,-4.4) 18(4.75,4.4)
  rect 1.8x0.8 smd paste-1000 mask+0: 2(-4.75,3.3) 3(-4.75,2.2) 4(-4.75,1.1) 5(-4.75,0) 6(-4.75,-1.1) 7(-4.75,-2.2) 8(-4.75,-3.3) 11(4.75,-3.3) 12(4.75,-2.2) 13(4.75,-1.1) 14(4.75,0) 15(4.75,1.1) 16(4.75,2.2) 17(4.75,3.3)
  silkscreen extent -7,-5.35 4.9,5.35, body extent -5.75,-5.45 5.75,5.45, height 0.25
FP-RC0603-0_55-IPC_C [mm]
  rect 0.659x0.812 smd paste+0 mask+0: 1(-0.677,0) 2(0.677,0)
  silkscreen extent -1.01,-0.85 1.01,0.85, body extent -1.11,-0.55 1.11,0.55, height 0.25
FP-RCS0603-e3-IPC_C [mm]
  rect 0.735x0.862 smd paste+0 mask+0: 1(-0.615,0) 2(0.615,0)
  silkscreen extent -0.98,-0.87 0.98,0.87, body extent -1.08,-0.58 1.08,0.58, height 0.25
FP-RT0603-IPC_C [mm]
  rect 0.659x0.812 smd paste+0 mask+0: 1(-0.677,0) 2(0.677,0)
  silkscreen extent -1.01,-0.85 1.01,0.85, body extent -0.76,-0.4 0.84,0.4, height 0.58
FP-RT0603-MFG [mm]
  rect 0.9x0.8 smd paste+0 mask+0: 1(-0.85,0) 2(0.85,0)
  silkscreen extent -0.85,-0.81 0.86,0.8, body extent -0.76,-0.4 0.84,0.4, height 0.58
FP-VFLGA-12-8365767-MFG [mm]
  rect 0.375x0.35 smd paste+0 mask+0: 1(-0.763,0.75) 2(-0.763,0.25) 3(-0.763,-0.25) 4(-0.763,-0.75) 7(0.763,-0.75) 8(0.763,-0.25) 9(0.763,0.25) 10(0.763,0.75)
  rect 0.35x0.375 smd paste+0 mask+0: 5(-0.25,-0.763) 6(0.25,-0.763) 11(0.25,0.763) 12(-0.25,0.763)
  silkscreen extent -2.1,-1.38 1.38,1.38, body extent -1.58,-1.58 1.58,1.58, height 0.25
FTSH10701LDVKTR [mm]
  rect 0.74x2.79 smd: 1(-3.81,-2.035) 2(-3.81,2.035) 3(-2.54,-2.035) 4(-2.54,2.035) 5(-1.27,-2.035) 6(-1.27,2.035) 7(0,-2.035) 8(0,2.035) 9(1.27,-2.035) 10(1.27,2.035) 11(2.54,-2.035) 12(2.54,2.035) 13(3.81,-2.035) 14(3.81,2.035)
  silkscreen extent -4.44,-4 4.44,0.4, body extent -4.44,-2.92 4.44,2.92, height 5.97
MS580305BA [mm]
  rect 2.25x0.9 smd: 1(2.675,-1.9) 2(2.675,-0.65) 3(2.675,0.65) 4(2.675,1.9) 5(-2.675,1.9) 6(-2.675,0.65) 7(-2.675,-0.65) 8(-2.675,-1.9)
  silkscreen extent -3.2,-3.1 4.39,3.1, body extent -2.88,-3.1 3.52,3.1, height 3.05
SOIC127P600X175-8N [mm]
  rect 1.525x0.65 smd: 1(-2.712,1.905) 2(-2.712,0.635) 3(-2.712,-0.635) 4(-2.712,-1.905) 5(2.712,-1.905) 6(2.712,-0.635) 7(2.712,0.635) 8(2.712,1.905)
  silkscreen extent -3.47,-2.45 1.6,2.58, body extent -3,-2.45 3,2.45, height 1.75
SOT95P280X110-6N [mm]
  rect 1.25x0.6 smd: 1(-1.25,0.95) 2(-1.25,0) 3(-1.25,-0.95) 4(1.25,-0.95) 5(1.25,0) 6(1.25,0.95)
  silkscreen extent -1.88,-1.45 0.28,1.6, body extent -1.4,-1.45 1.4,1.45, height 0.97
STM-LGA-10 [mm] "LGA, 10-Leads, Body 2.5x2.5mm, Pitch 0.6mm"
  rect 0.45x0.3 smd: 1(-0.92,0.3) 2(-0.92,-0.3) 6(0.92,-0.3) 7(0.92,0.3)
  rect 0.3x0.45 smd: 3(-0.6,-0.92) 4(0,-0.92) 5(0.6,-0.92) 8(0.6,0.92) 9(0,0.92) 10(-0.6,0.92)
  silkscreen extent -1.59,-1.25 1.25,1.25, body extent -1.25,-1.25 1.25,1.25, height 0.8
WL-SMCD_0603 [mm] "SMD Mono-color Chip LED, body 1.6x0.8mm"
  rect 0.8x0.75 smd: 1(-1270.8,-1270) 2(-1269.2,-1270)
  silkscreen extent -1271.62,-1270.4 -1269.78,-1269.6, body extent -1270.8,-1270.4 -1269.2,-1269.6, height 0.42
WL-SMCW_0603_150060xx75000 [mm] "SMD Mono-color Chip LED, body 1.6x0.8mm"
  rect 0.8x0.8 smd: 1(-0.8,0) 2(0.8,0)
  silkscreen extent -1.55,-0.4 -1.4,0.4, body extent -0.8,-0.4 0.8,0.4, height 0.7
WL-SMCW_0603_150060xx75020 [mm] "SMD Mono-color Chip LED, body 1.6x0.8mm"
  rect 0.8x0.8 smd: 1(-0.8,0) 2(0.8,0)
  silkscreen extent -1.62,-0.07 -1.47,0.07, body extent -0.8,-0.4 0.8,0.4, height 0.25
XT60PWM [mm]
  round 4.05 hole 2.7: 1(-3.6,0) 2(3.6,0)
  round 2.7 hole 1.8: 3(6.75,6) 4(-6.75,6)
  silkscreen extent -7.75,-1.85 7.75,16.35, body extent -7.95,-1.98 7.95,16.3, height 8.44

## Part data
C1 C6 C9 C14 C20 C22 C23 C24 C25 C26 C27 C28 C29 C30 C31 C33 C35 C38 C39 C40 C42: library part CMP-13271-002683-1, "Cap Ceramic 100nF 16V X7R ±10% Pad SMD 0603 +125°C T/R / CL10B104KO8WPNC", Capacitance=100nF, Case Code (Imperial)=0603, Case Code (Metric)=1608, Max Operating Temperature=125°C, Min Operating Temperature=-55°C, Ratings=AEC-Q200, Tolerance=10%, Voltage Rating=16V, Case/Package=0603, Features="Soft Termination", Length=0.063inch, Mount="Surface Mount", Packaging="Tape and Reel", Thickness=0.035inch, Width=0.031inch
C2 C3: library part CMP-13271-002940-1, "Cap Ceramic 8pF 100V C0G ±0.5pF Pad SMD 0603 +125°C T/R / CL10C080DC81PNC", Case Code (Imperial)=0603, Case Code (Metric)=1608, Max Operating Temperature=125°C, Min Operating Temperature=-55°C, Ratings=AEC-Q200, Voltage Rating=100V, Capacitance=8pF, Case/Package=0603, Length=0.063inch, Mount="Surface Mount", Packaging="Tape and Reel", Thickness=0.035inch, Width=0.031inch
C4 C5: library part CMP-03020-023157-1, "C0603 1.5 pF X8R 30ppm/°C 0.1 pF 25 V / C0603C159B3HACTU", Capacitance="1.5 pF", Manufacturer=KEMET, Manufacturer Part Number=C0603C159B3HACTU, Package=C0603C-CF, Temperature="-55°C to +125°C", Temperature Characteristic=X8R, Temperature Coefficient=30ppm/°C, Temperature Range High=+125°C, Temperature Range Low=-55°C, Tolerance="0.1 pF", Voltage Rating="25 V", Automotive=Yes, Automotive Grade="Grade 1", Category=Cap, ComponentLink2Description=Datasheet, ComponentLink2URL=https://api.kemet.com/component-edge/download/datasheet/C0603C100J5GACAUTO.pdf, Device Class L1="Passive Components", Device Class L2=Capacitors, Device Class L3="Ceramic Capacitors", Height=0.87mm, Lead Free=Yes, Material=Ceramic, Octopart=https://octopart.com/c0603c159b3hactu-kemet-88725126, RoHS=TRUE
C7 C32 C34 C36 C37 C41: library part CMP-13271-003287-1, "Cap Ceramic 10uF 16V X6S ±20% Pad SMD 0603 +105°C T/R / CL10X106MO8NRNC", Case Code (Imperial)=0603, Case Code (Metric)=1608, Max Operating Temperature=105°C, Min Operating Temperature=-55°C, Tolerance=20%, Voltage Rating=16V, Capacitance=10uF, Case/Package=0603, Length=0.063inch, Mount="Surface Mount", Packaging="Tape and Reel", Thickness=0.035inch, Width=0.031inch
C8: library part CMP-03422-000465-1, "CAP CER 10000PF 16V X7R 0603 / CC0603KRX7R7BB103", Capacitance="10 nF", Manufacturer=YAGEO, Manufacturer Part Number=CC0603KRX7R7BB103, Package=CC0603-DA, Temperature="-55°C to +125°C", Temperature Characteristic=X7R, Temperature Coefficient=15%, Temperature Range High=+125°C, Temperature Range Low=-55°C, Tolerance=0.1, Voltage="16 V", Automotive=No, Category=Cap, ComponentLink2Description=Datasheet, ComponentLink2URL=http://www.yageo.com/documents/recent/UPY-GPHC_X7R_6.3V-to-50V_18.pdf, Device Class L1="Passive Components", Device Class L2=Capacitors, Device Class L3="Ceramic Capacitors", Digikey Description="CAP CER 10000PF 16V X7R 0603", Footprint Url=http://www.yageo.com/exep/pages/download/literatures/UPY-C_GEN_24.pdf, Height=0.9mm, Lead Free=Yes, Material=Ceramic, Mouser Description="Multilayer Ceramic Capacitors MLCC - SMD/SMT 10nF 16V X7R 10%", Octopart=https://octopart.com/cc0603krx7r7bb103-yageo-9288150, RoHS=TRUE, Voltage Rating="16 V"
C10 C12: library part CMP-06035-047895-1, "GCJ188R72A104KA01D Cap Ceramic 0.1uF 100V X7R 10% Pad SMD 0603 Soft Termination +125°C Automotive T/R", Capacitance=100nF, Case Code (Imperial)=0603, Case Code (Metric)=1608, Max Operating Temperature=125°C, Min Operating Temperature=-55°C, Ratings=AEC-Q200, Tolerance=10%, Voltage Rating=100V, Case/Package=0603, Features="Soft Termination", Lead Free="Lead Free", Length=0.063inch, Mount="Surface Mount", Packaging="Tape and Reel", Thickness=0.035inch, Width=0.031inch
C11: library part CMP-06035-043613-1, "GRM188R61H225ME11J Chip Multilayer Ceramic Capacitors for General Purpose, 0603, 2.2uF, X5R, 15%, 20%, 50V"
C13 C19 C43: library part CMP-13271-000784-1, "Cap Ceramic 1uF 16V X7R ±10% Pad SMD 0603 +125°C T/R / CL10B105KO8NNNL", Case/Package=0603, Dielectric=X7R, Max Operating Temperature=125°C, Min Operating Temperature=-55°C, Package Quantity=15000, Tolerance=10%, Voltage Rating=16V, Capacitance=1uF, Depth=0.8mm, Height=0.8mm, Lead Free="Lead Free", Length=1.6mm, Mount="Surface Mount", Packaging="Tape and Reel", Radiation Hardening=No, Thickness=0.035inch, Voltage Rating (DC)=16V, Width=0.031inch
C15 C16: library part CMP-06035-036790-1, "GRM21BR61E226ME44K Chip Multilayer Ceramic Capacitors for General Purpose, 0805, 22uF, X5R, 15%, 20%, 25V", Capacitance=22uF, Case Code (Imperial)=0805, Case Code (Metric)=2012, Dielectric=X5R, Max Operating Temperature=85°C, Min Operating Temperature=-55°C, Package Quantity=10000, Resistor Type=Ceramic, Tolerance=20%, Voltage Rating=25V, Case/Package=0805, Height=1.25mm, Length=0.079inch, Mount="Surface Mount", Packaging="Tape and Reel", Termination=SMD/SMT, Thickness=0.057inch, Voltage Rating (DC)=25V, Weight=0.000335oz, Width=1.25mm
C17 C18: library part CMP-13271-003360-1, "Cap Ceramic 2.2uF 16V X5R ±10% Pad SMD 0603 +85°C T/R / CL10A225KO8NNND", Capacitance=2.2nF, Case/Package=0603, Dielectric=X5R, Max Operating Temperature=85°C, Min Operating Temperature=-55°C, Tolerance=10%, Voltage Rating (DC)=16V, Depth=0.8mm, Length=1.6mm, Packaging="Tape and Reel", Radiation Hardening=No
C21: library part CMP-08246-005518-1, "Multilayer Ceramic Capacitors 4.7μF ±10% 25V X5R SMD 0603 / C1608X5R1E475K080AC", Case Code (Imperial)=0603, Case Code (Metric)=1608, Dielectric=X5R, Dielectric Material=Ceramic, Max Operating Temperature=85°C, Min Operating Temperature=-55°C, Package Quantity=4000, Tolerance=10%, Voltage Rating=25V, Capacitance=4.7uF, Case/Package=0603, Construction=Flat, Depth=0.8mm, Height=0.8mm, Lead Free="Lead Free", Length=1.6mm, Mount="Surface Mount", Packaging="Tape and Reel", REACH SVHC="No SVHC", Resistor Type=Ceramic, RoHS Compliant=Yes, Series=C, Termination=SMD/SMT, Thickness=0.039inch, Voltage Rating (DC)=25V, Weight=7.1E-05oz, Width=0.031inch
D1: library part CMP-1426-00001-3, Case Code (Imperial)=0603, Case Code (Metric)=1608, Color=Red, Forward Current=100mA, Forward Voltage=2V, Max Junction Temperature (Tj)=95°C, Max Operating Temperature=85°C, Max Reverse Voltage (DC)=5V, Min Operating Temperature=-40°C, Power Dissipation=72mW, Test Current=20mA, Case/Package=0603, Dominant Wavelength=625nm, Height=700µm, Length=1.6mm, Lens Style="Clear, Rectangular", Luminous Intensity=250mcd, Mount="Surface Mount", NexarPartId=29717776, Packaging="Tape and Reel", Peak Wavelength=630nm, REACH SVHC=Unknown, Reverse Voltage=5V, RoHS=Compliant, Viewing Angle=140°, Wavelength=625nm, Width=800µm
D2: library part CMP-03913-90235563-2, "150060GS55040 WL-SMCD SMT Mono-color Chip LED Diffused", Forward Current=60mA, Forward Voltage=3.2V, Max Operating Temperature=85°C, Max Reverse Voltage (DC)=5V, Min Operating Temperature=-40°C, Dominant Wavelength=525nm, Height=400µm, Length=1.6mm, Luminous Intensity=430mcd, NexarPartId=90235563, Packaging="Tape and Reel", Peak Wavelength=520nm, RoHS=Compliant, Viewing Angle=140°, Wavelength=525nm, Width=800µm
D3: library part CMP-03913-104891429-2, "WL-SMCW SMT Mono-Color Chip LED Waterclear super f", Forward Current=60mA, Forward Voltage=2V, Max Operating Temperature=85°C, Max Reverse Voltage (DC)=5V, Min Operating Temperature=-40°C, Dominant Wavelength=590nm, Height=250µm, Length=1.6mm, Luminous Intensity=130mcd, Peak Wavelength=595nm, RoHS=Compliant, Viewing Angle=140°, Width=800µm
IC1: "Integrated Circuit", Manufacturer_Name="TE Connectivity", Mouser Part Number=824-MS580301BA01-00, Arrow Part Number=MS580301BA01-00, Arrow Price/Stock=https://www.arrow.com/en/products/ms580301ba01-00/te-connectivity?utm_currency=USD&region=nac, Datasheet Link=https://www.te.com/commerce/DocumentDelivery/DDEController?Action=srchrtrv&DocNm=MS5803-01BA&DocType=Data%20Sheet&DocLang=English&PartCntxt=MS580301BA01-00&DocFormat=pdf, Manufacturer_Part_Number=MS580301BA01-00, Mouser Price/Stock=https://www.mouser.co.uk/ProductDetail/Measurement-Specialties/MS580301BA01-00?qs=oFx6pF86PmAy4BWNR5QDKw%3D%3D
IC2: "Integrated Circuit", Manufacturer_Name="Texas Instruments", Mouser Part Number=595-TCAN3414DR, Arrow Part Number=TCAN3414DR, Arrow Price/Stock=https://www.arrow.com/en/products/tcan3414dr/texas-instruments?region=nac, Datasheet Link=https://www.ti.com/lit/ds/symlink/tcan3414.pdf?ts=1713723144569&ref_url=https%253A%252F%252Fwww.mouser.ch%252F, Height=1.75mm, Manufacturer_Part_Number=TCAN3414DR, Mouser Price/Stock=https://www.mouser.co.uk/ProductDetail/Texas-Instruments/TCAN3414DR?qs=mELouGlnn3egF2AojRJddw%3D%3D
J1: "Connector", Manufacturer_Name=SAMTEC, Mouser Part Number=200-FTSH10701LDVKTR, Arrow Part Number=FTSH-107-01-L-DV-K-TR, Arrow Price/Stock=https://www.arrow.com/en/products/ftsh-107-01-l-dv-k-tr/samtec?region=nac, Datasheet Link=https://suddendocs.samtec.com/prints/ftsh-1xx-xx-xxx-dv-xxx-xxx-x-xx-mkt.pdf?_gl=1*mdiyn1*_ga*MTcyMTUxMTIwMy4xNzEyMDQxMTc2*_ga_3KFNZC07WW*MTcxMjEzMDIxOS4yLjEuMTcxMjEzMDI1NC4yNS4wLjA., Height=6.25mm, Manufacturer_Part_Number=FTSH-107-01-L-DV-K-TR, Mouser Price/Stock=https://www.mouser.co.uk/ProductDetail/Samtec/FTSH-107-01-L-DV-K-TR?qs=%252BZP6%2F%252BtExtDlh0wyxE013Q%3D%3D
J3 J?: "Connector", Manufacturer_Name=Weidmuller, Datasheet Link=https://catalog.weidmueller.com/catalog/Start.do;jsessionid=2545CA0BAB23962A974316635BA0C98D?ObjectID=1412410000&page=Product, Height=9.65mm, Manufacturer_Part_Number=1412410000
J4: "Connector", Manufacturer_Name="Changzou Amass Elec", Datasheet Link=https://www.tme.eu/Document/9b8d0c5eb7094295f3d3112c214d3ade/XT60PW%20SPEC.pdf, Height=8.4mm, Manufacturer_Part_Number=XT60PW-M
J5: library part CMP-111093-000001-1, "CONN SMA JACK STR 50OHM EDGE MNT", Frequency=12.4GHz, Manufacturer="Taoglas Limited", Package=0, Temperature="-40°C to +85°C", Temperature Range High=+85°C, Temperature Range Low=-40°C, Voltage Rating=335V, Automotive=No, Category=Conn, ComponentLink2Description=Datasheet, ComponentLink2URL=https://cdn.taoglas.com/datasheets/EMPCB.SMAFSTJ.B.HT.pdf, Conn Orientation=Horizontal, Contact Material=Gold, Device Class L1=Connectors, Device Class L2="RF / Coaxial Connectors", Device Class L3=unset, Digikey Description="CONN SMA JACK STR 50OHM EDGE MNT", Impedance=50Ω, Is Female=yes, Lead Free=Yes, Manufacturer Part Number=EMPCB.SMAFSTJ.B.HT, Mouser Description="RF Connectors / Coaxial Connectors SMA Straight Edge Mount PCB Jack-Gold", Number of Contacts=1, Octopart=https://octopart.com/empcb.smafstj.b.ht-taoglas-24204431, Pitch=2.62mm, RoHS=TRUE
J6: library part CMP-15831-000101-1, "CONN HEADER VERT 2POS 2MM", Case/Package=SIL, Color=Black, Contact Resistance=20mR, Current Rating=1A, Flammability Rating="UL94 V-0", Insulation Resistance=10GR, Max Operating Temperature=105°C, Min Operating Temperature=-55°C, Package Quantity=1000, Voltage Rating=650V, Voltage Rating (AC)=250V, Connector Type="Male Pin", Contact Finish - Mating=GOLD, Contact Material=Bronze, Contact Mating Length=0.138inch, Contact Plating=Gold, Contact Shape=Square, Contact Type="Male Pin", Depth=2mm, Fastening Type=Pull, Gender=Male, Housing Color=Black, Housing Material=Nylon, Insulation Color=Black, Insulation Material=Nylon, Length=4mm, Mated Stacking Heights=8.6mm, Max Current Rating=1A, Mount="Through Hole", Number of Contacts=2, Number of Positions=2, Number of Rows=1, Orientation=Straight, Packaging=Bulk, Pitch=2mm, Radiation Hardening=No, Reach SVHC Compliant=Yes, Series=M22, Termination=Solder
L1: library part CMP-06042-000661-1, "Wire Wound RF Inductor 27nH ±5% 500mA 0.25Ω 0805 (2015)", Case Code (Imperial)=0806, Case Code (Metric)=2015, Case/Package=0805, Current Rating=500mA, DC Resistance (DCR)=250mR, Inductance=27nH, Max Operating Temperature=125°C, Min Operating Temperature=-55°C, Package Quantity=2000, Resistor Type=Wirewound, Self Resonant Frequency=2.58GHz, Test Frequency=250MHz, Tolerance=5%, Core Material=Air, DC Current=500mA, Depth=1.73mm, Height=1.42mm, Height - Seated (Max)=0.06inch, Length=0.082inch, Max DC Current=500mA, Military Standard=Not, Mount="Surface Mount", Packaging="Tape and Reel", Q Factor=55, Radiation Hardening=No, Shielding=Unshielded, Termination=SMD/SMT, Weight=0.000494oz, Width=1.5mm
L2: library part CMP-02424-000228-1, "IHLP4040DZER6R8M01 Commercial Inductors, High Saturation Series 6.8uH 8A 23.3mΩ 20%", Case/Package=4040, Current Rating=8A, DC Resistance (DCR)=23.3mR, Inductance Tolerance=20%, Max DC Current=13.5A, Max Operating Temperature=125°C, Min Operating Temperature=-55°C, Package Quantity=500, Self Resonant Frequency=5MHz, Test Frequency=100kHz, Contact Plating=Tin, Core Material=Metal, Depth=10.3mm, Height=4mm, Height - Seated (Max)=0.157inch, Inductance=6.8uH, Lead Free="Lead Free", Length=0.43inch, Military Standard=Not, Mount="Surface Mount", Number of Pins=4040, Packaging="Tape and Reel", Radiation Hardening=No, RMS Current (Irms)=8A, Saturation Current=13.5A, Shielding=Shielded, Termination=SMD/SMT, Tolerance=20%, Width=0.405inch
MD1: library part CMP-207130-000026-1, "GNSS LCC RX, ROM, TCXO, LNA, SAW"
PS1: "Power Supply", Manufacturer_Name="Texas Instruments", Mouser Part Number=595-LMR51430XDDCR, Arrow Part Number=LMR51430XDDCR, Arrow Price/Stock=https://www.arrow.com/en/products/lmr51430xddcr/texas-instruments?region=nac, Datasheet Link=https://www.ti.com/lit/ds/symlink/lmr51430.pdf?HQS=dis-mous-null-mousermode-dsf-pf-null-wwe&ts=1665567212982&ref_url=https%253A%252F%252Fwww.mouser.co.uk%252F, Height=1.1mm, Manufacturer_Part_Number=LMR51430XDDCR, Mouser Price/Stock=https://www.mouser.co.uk/ProductDetail/Texas-Instruments/LMR51430XDDCR?qs=vvQtp7zwQdP8miJIr5Aupg%3D%3D
R1 R2: library part CMP-2000-04587-2, "Res Thin Film 0603 4.7K Ohm 0.5% 1/10W ±25ppm/°C Molded SMD Paper T/R / RT0603DRD074K7L", Manufacturer=Yageo, Manufacturer Part Number=RT0603DRD074K7L, Package=RT0603, Power Rating=0.1W, Resistance=4.7KΩ, Temperature="-55°C to +155°C", Temperature Coefficient="25 ppm/°C", Temperature Range High=+155°C, Temperature Range Low=-55°C, Tolerance=0.005, Voltage Rating=75V, Automotive=No, Category=Res, ComponentLink2Description=Datasheet, ComponentLink2URL=http://www.yageo.com/documents/recent/PYu-RT_1-to-0.01_RoHS_L_9.pdf, Composition="Thin Film", Device Class L1="Passive Components", Device Class L2=Resistors, Device Class L3="Chip SMD Resistors", Digikey Description="Res Thin Film 0603 4.7K Ohm 0.5% 1/10W ±25ppm/°C Molded SMD Paper T/R", Footprint Url=http://www.yageo.com/exep/pages/download/literatures/PYu-R_Mount_10.pdf, Height=0.55mm, Ipc Land Pattern Name=RESC16080X45, Lead Free=Yes, Octopart=https://octopart.com/rt0603drd074k7l-yageo-1182481, RoHS=TRUE, Series=RT
R3 R4 R5: library part CMP-03412-005349-1, "RES SMD 10K OHM 1% 1/10W 0603 / RT0603FRE0710KL", Manufacturer=Yageo, Manufacturer Part Number=RT0603FRE0710KL, Package=RT0603, Power Rating=0.1W, Resistance=10KΩ, Temperature="-55°C to +155°C", Temperature Coefficient="50 ppm/°C", Temperature Range High=+155°C, Temperature Range Low=-55°C, Tolerance=0.01, Voltage Rating=75V, Automotive=No, Category=Res, ComponentLink2Description=Datasheet, ComponentLink2URL=http://www.yageo.com/documents/recent/PYu-RT_1-to-0.01_RoHS_L_9.pdf, Composition="Thin Film", Device Class L1="Passive Components", Device Class L2=Resistors, Device Class L3="Chip SMD Resistors", Digikey Description="RES SMD 10K OHM 1% 1/10W 0603", Footprint Url=http://www.yageo.com/exep/pages/download/literatures/PYu-R_Mount_10.pdf, Height=0.55mm, Ipc Land Pattern Name=RESC16080X45, Lead Free=Yes, Mouser Description="Thin Film Resistors - SMD 10K ohm 1% 1/10W", Octopart=https://octopart.com/rt0603fre0710kl-yageo-40009243, RoHS=TRUE, Series=RT
R6 R7 R8: library part CMP-03412-038529-1, "AF0603JR-07220RL Anti-Sulfurated Chip Resistors Automotive Grade 220Ω 5% 100ppm/°C 0603", Case/Package=0603, Max Operating Temperature=155°C, Max Power Dissipation=100mW, Min Operating Temperature=-55°C, Resistance=220R, Resistor Type="Thick Film", Temperature Coefficient=100ppm/°C, Tolerance=5%, Features="Moisture Resistant", Height=0.022inch, Lead Free="Lead Free", Length=0.063inch, Number of Terminations=2, Packaging="Tape and Reel", RoHS Compliant=Yes, Series=AF, Width=0.031inch
R9: library part CMP-03412-030646-1, "RT0603 100Ω 0.1W 50 ppm/°C 1.00% RT0603FRE07100RL", Manufacturer=Yageo, Manufacturer Part Number=RT0603FRE10100RL, Package=RT0603, Power Rating=0.1W, Resistance=100Ω, Temperature="-55°C to +155°C", Temperature Coefficient="50 ppm/°C", Temperature Range High=+155°C, Temperature Range Low=-55°C, Tolerance=0.01, Voltage Rating=75V, Automotive=No, Category=Res, ComponentLink2Description=Datasheet, ComponentLink2URL=http://www.yageo.com/documents/recent/PYu-RT_1-to-0.01_RoHS_L_9.pdf, Composition="Thin Film", Device Class L1="Passive Components", Device Class L2=Resistors, Device Class L3="Chip SMD Resistors", Footprint Url=http://www.yageo.com/exep/pages/download/literatures/PYu-R_Mount_10.pdf, Height=0.55mm, Ipc Land Pattern Name=RESC16080X45, Lead Free=Yes, Octopart=https://octopart.com/rt0603fre10100rl-yageo-22252409, RoHS=TRUE, Series=RT
R10: library part CMP-02407-012574-1, "RES SMD 10 OHM 1% 1/4W 0603 RCS060310R0FKEA", Case Code (Imperial)=0603, Case Code (Metric)=1608, Max Operating Temperature=155°C, Max Power Dissipation=250mW, Min Operating Temperature=-55°C, Resistance=10R, Resistor Type="Thick Film", Temperature Coefficient=100ppm/°C, Tolerance=1%, Case/Package=0603, Features="Automotive AEC-Q200", Height=0.02inch, Length=0.061inch, Number of Terminations=2, Packaging="Tape and Reel", RoHS Compliant=Yes, Width=0.033inch
R11: library part CMP-2100-03662-2, "RC0603FR-07100KL RES SMD 100K OHM 1% 1/10W 0603", Case Code (Imperial)=0603, Case Code (Metric)=1608, Max Operating Temperature=155°C, Max Power Dissipation=100mW, Min Operating Temperature=-55°C, Resistance=100kR, Resistance Tolerance=1%, Resistor Type="Thick Film", Temperature Coefficient=100ppm/°C, Voltage Rating=50V, Working Voltage=75V, Case/Package=0603, Construction=Rectangular, Depth=0.8mm, Features="Moisture Resistant", Height=0.45mm, Lead Free="Lead Free", Length=1.6mm, Military Standard=Not, Number of Pins=2, Number of Terminations=2, Packaging="Tape and Reel", Power Rating=100mW, REACH SVHC="No SVHC", RoHS Compliant=Yes, Series=RC, Technology="THICK FILM", Termination=SMD/SMT, Tolerance=1%, Voltage Rating (DC)=50V, Width=0.8mm
R12: library part CMP-2000-00242-2, "ERJ-3EKF1372V", Case Code (Imperial)=0603, Case Code (Metric)=1608, Max Operating Temperature=155°C, Max Power Dissipation=100mW, Min Operating Temperature=-55°C, Resistance=13.7kΩ, Temperature Coefficient=100ppm/°C, Tolerance=1%, Voltage Rating=75V, Voltage Rating (DC)=50V, Case/Package=0603, Composition="Thick Film", Contact Plating=Tin, Depth=800µm, Features="Automotive AEC-Q200", Height=558.8µm, Lead Free="Lead Free", Length=1.6mm, Lifecycle Status=Production, Military Standard=Not, Mount="Surface Mount", NexarPartId=55411167, Number of Terminations=2, Packaging="Cut Tape (CT)", Power Rating=100mW, REACH SVHC=Unknown, RoHS=Compliant, Schedule B="8533210045, 8533210045", Termination=SMD/SMT, Width=787.4µm